# Altium PCB Chicken_Coop_Door_Main_Board_V3.PcbDoc (part 1 of 2)
Units mm, origin at the board's own origin, x right, y up, seen from the top; angles counter-clockwise.
Board outline 52.93 x 44.3 mm, 4 copper layers (Top Layer, Mid-Layer 1, Mid-Layer 2, Bottom Layer), stack 0.949 mm thick; 86 components, 66 nets, 267 pads, 85 vias.
Unrouted connection lines stored in the file: 4.
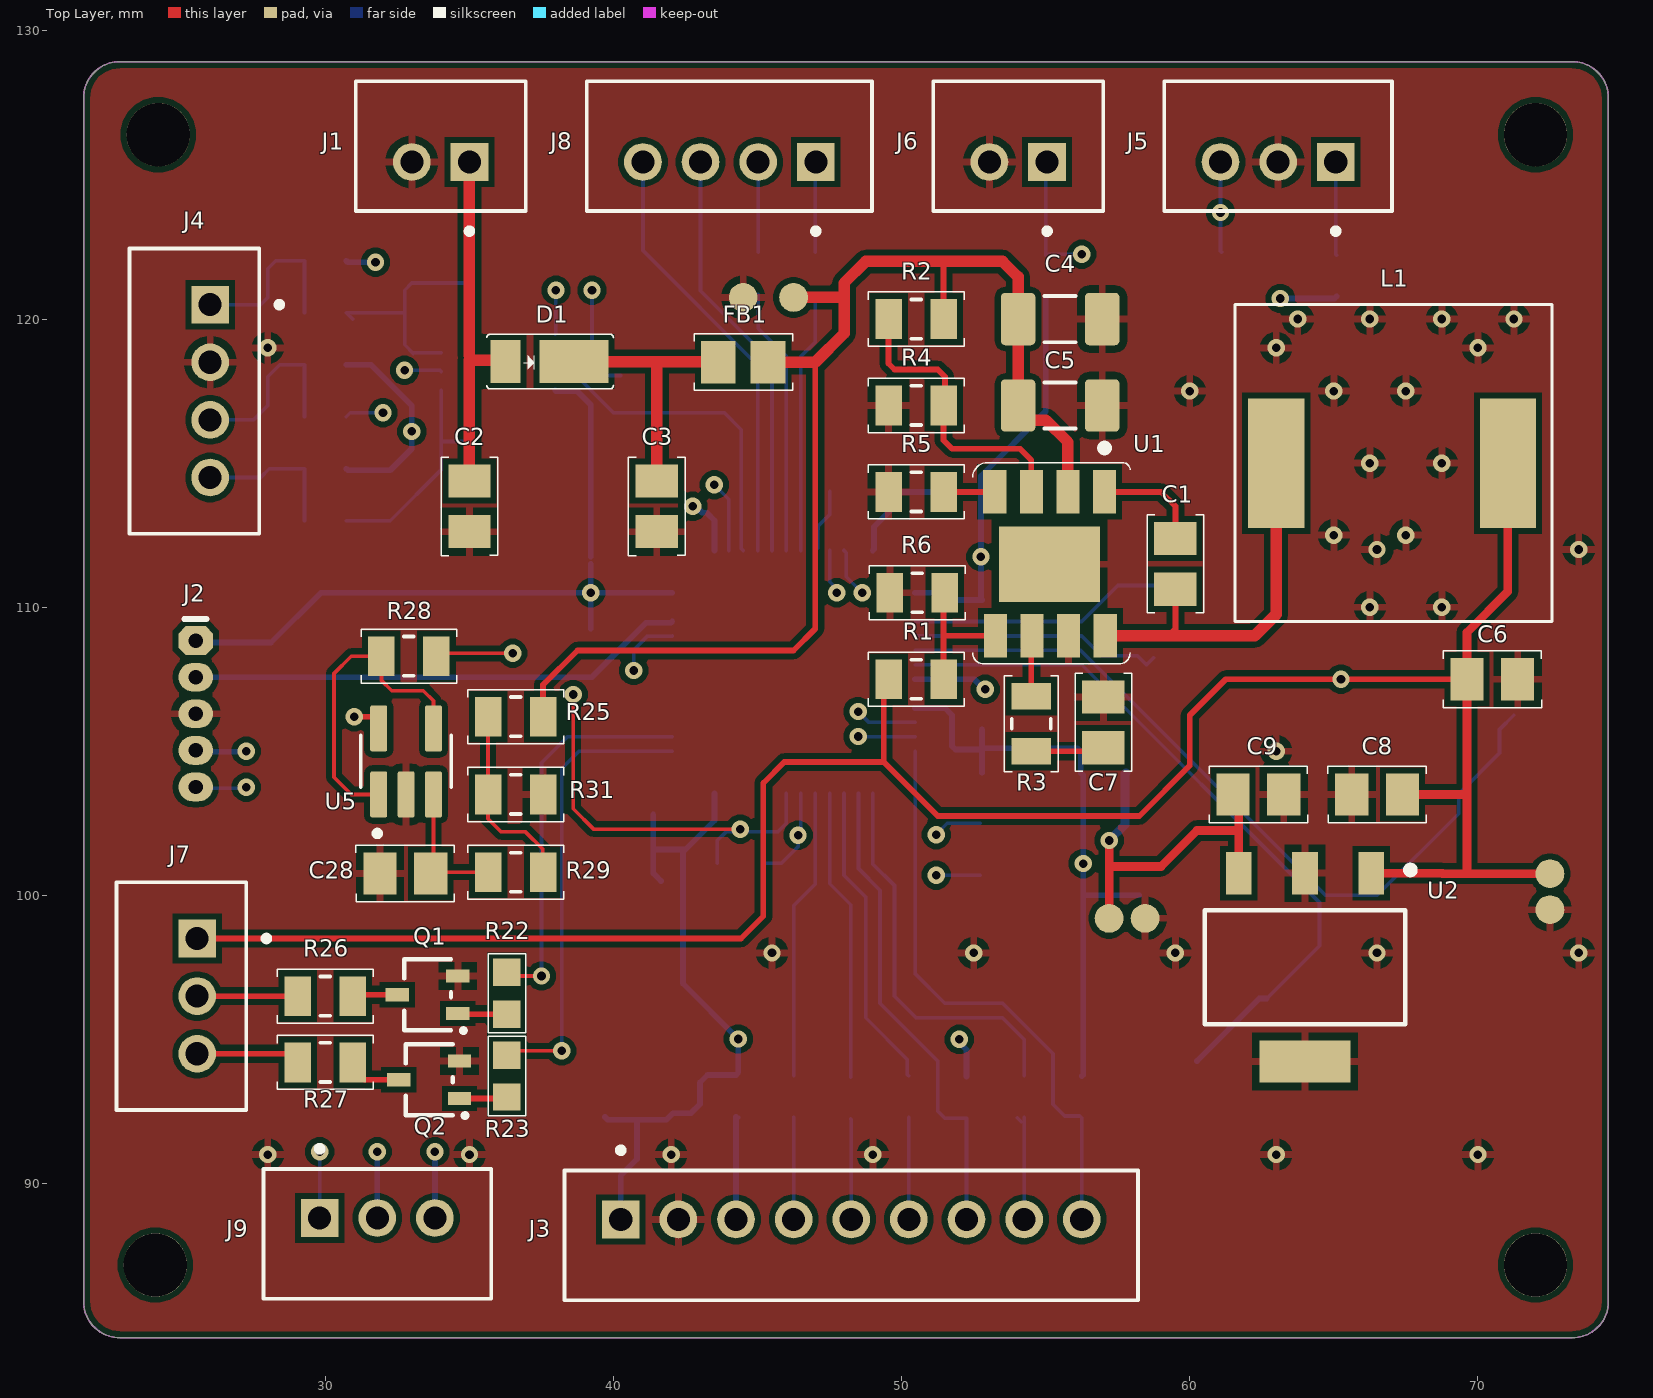
[diagram p0: Top Layer view]
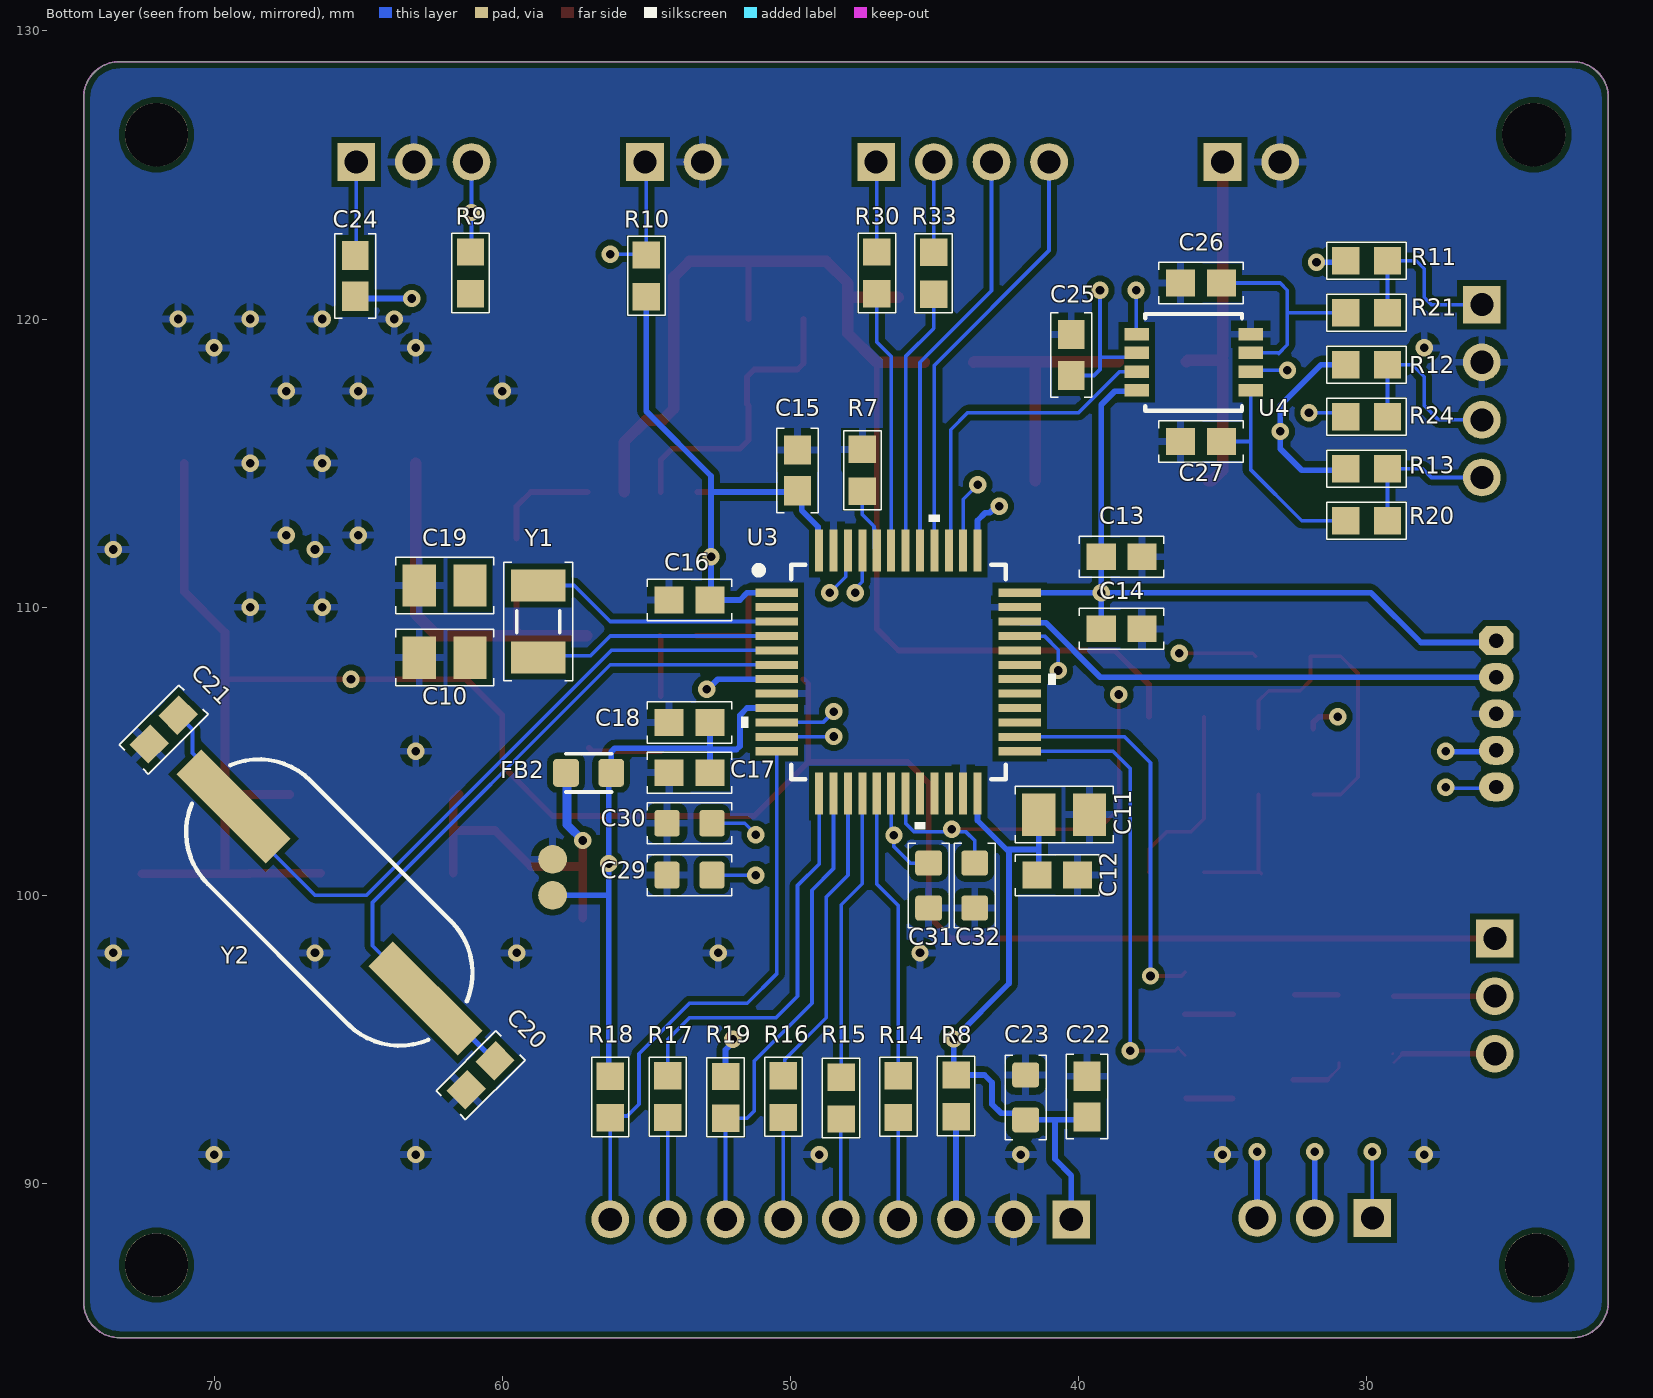
[diagram p1: Bottom Layer view, seen from below]
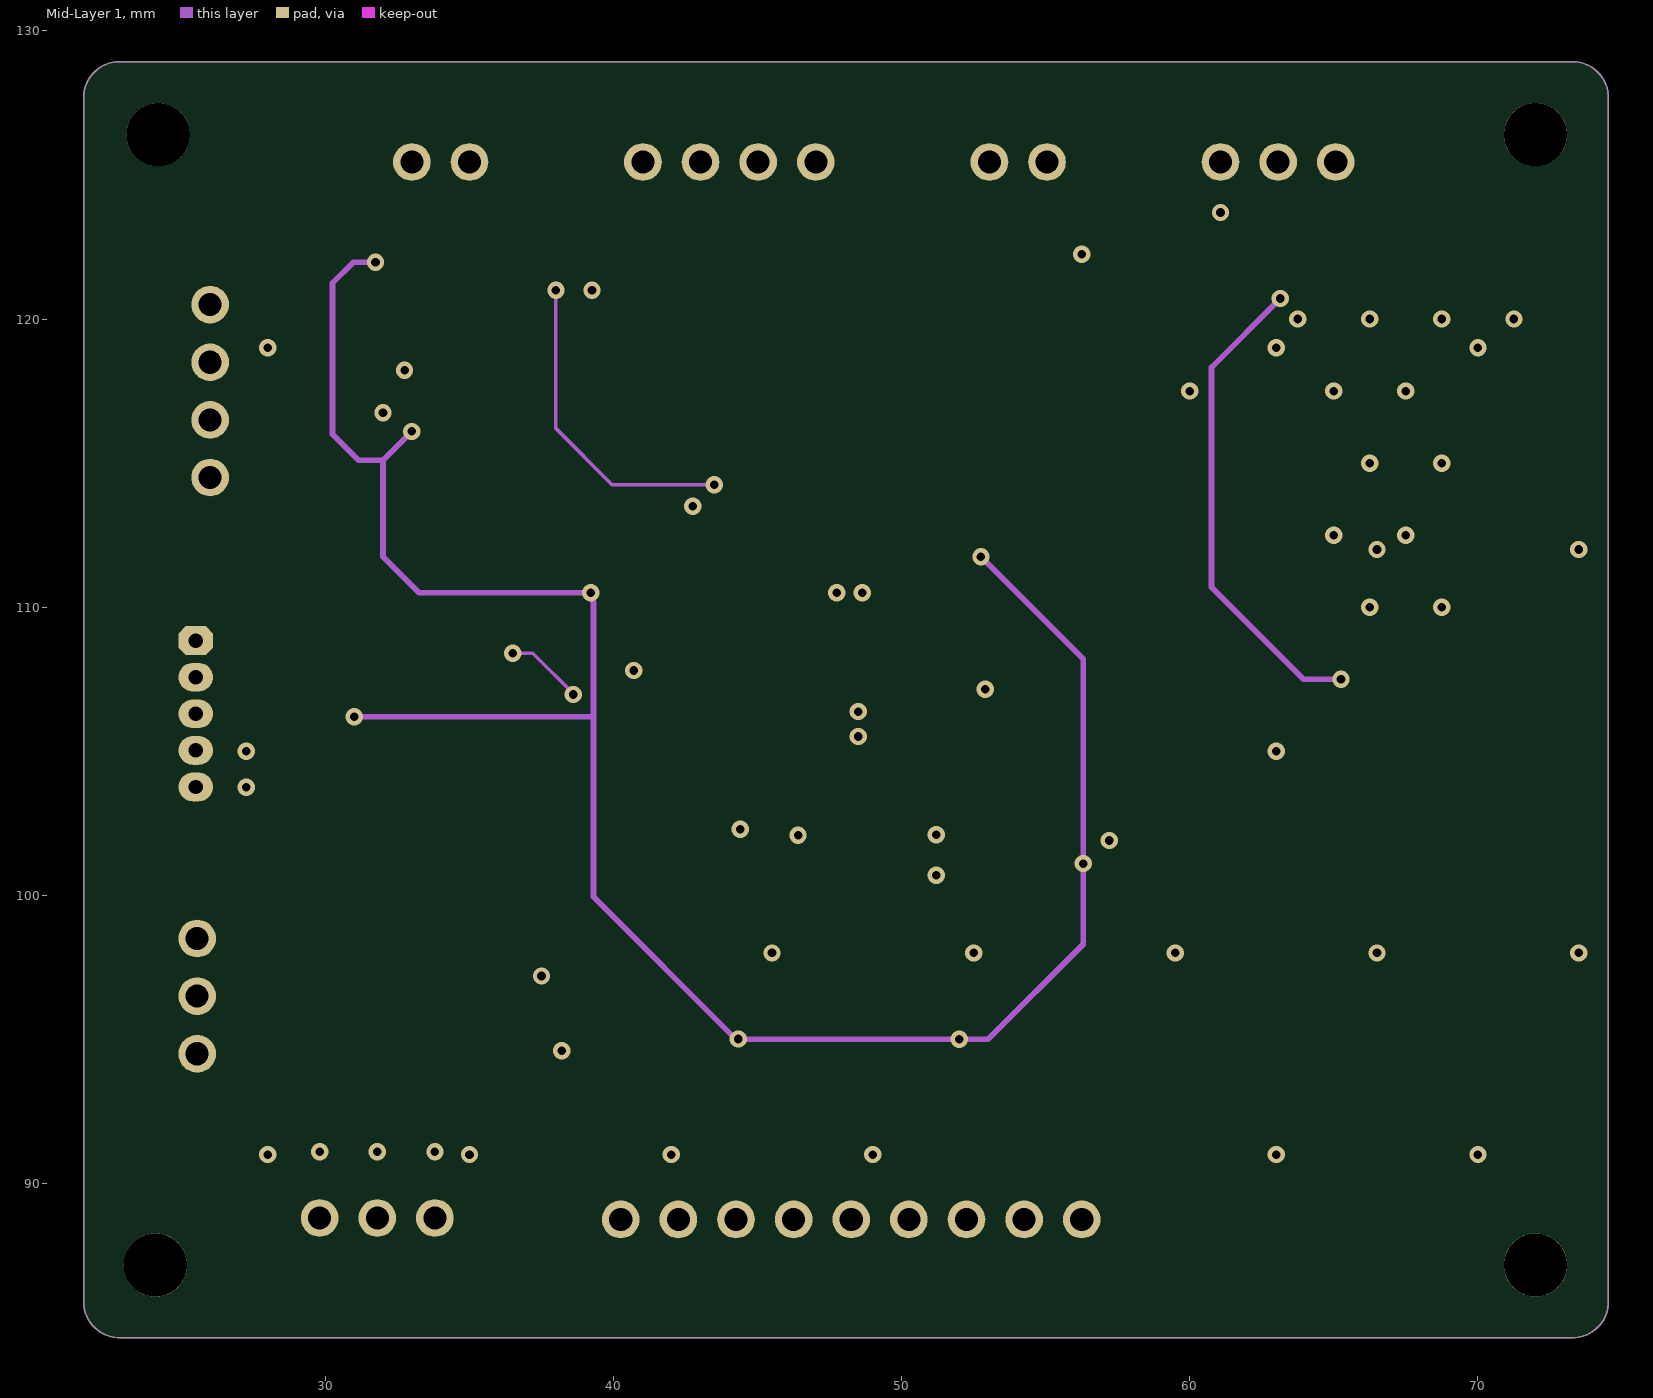
[diagram p2: Mid-Layer 1]
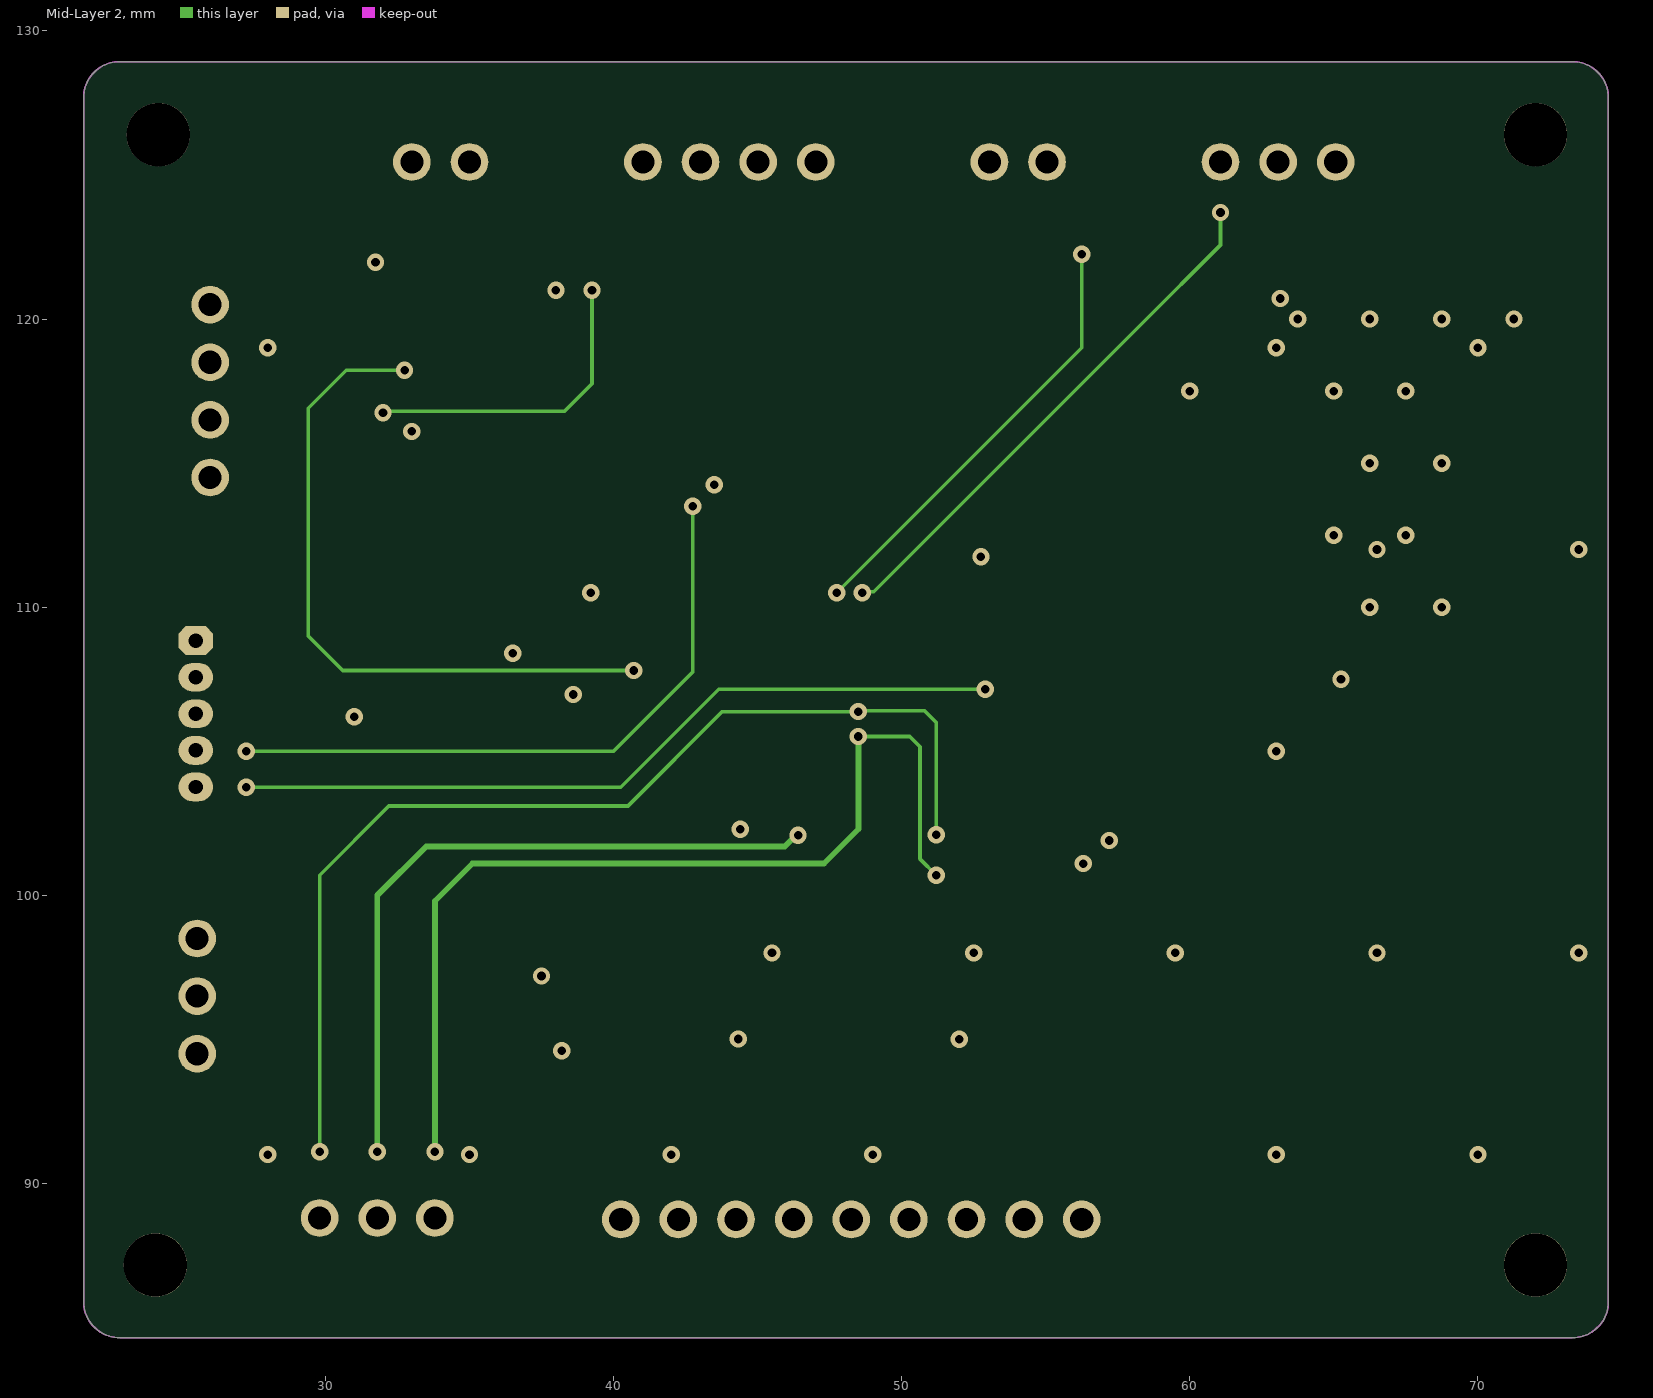
[diagram p3: Mid-Layer 2]
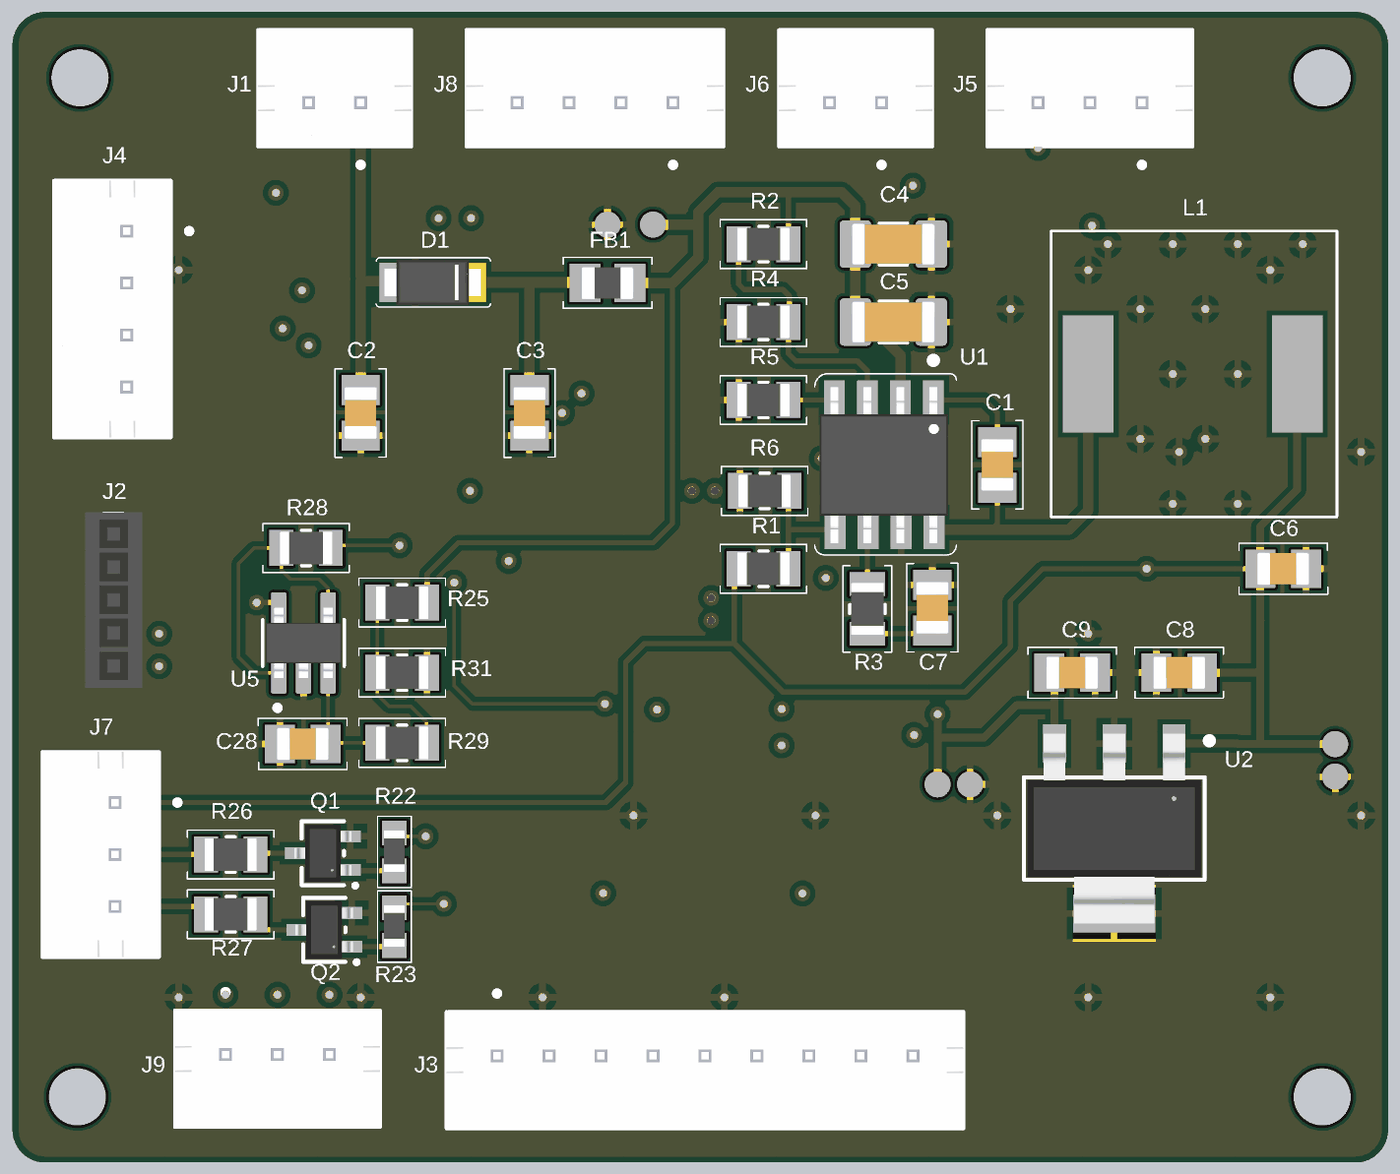
[diagram p4: 3D render of the assembled board from above, using the file's embedded part models]
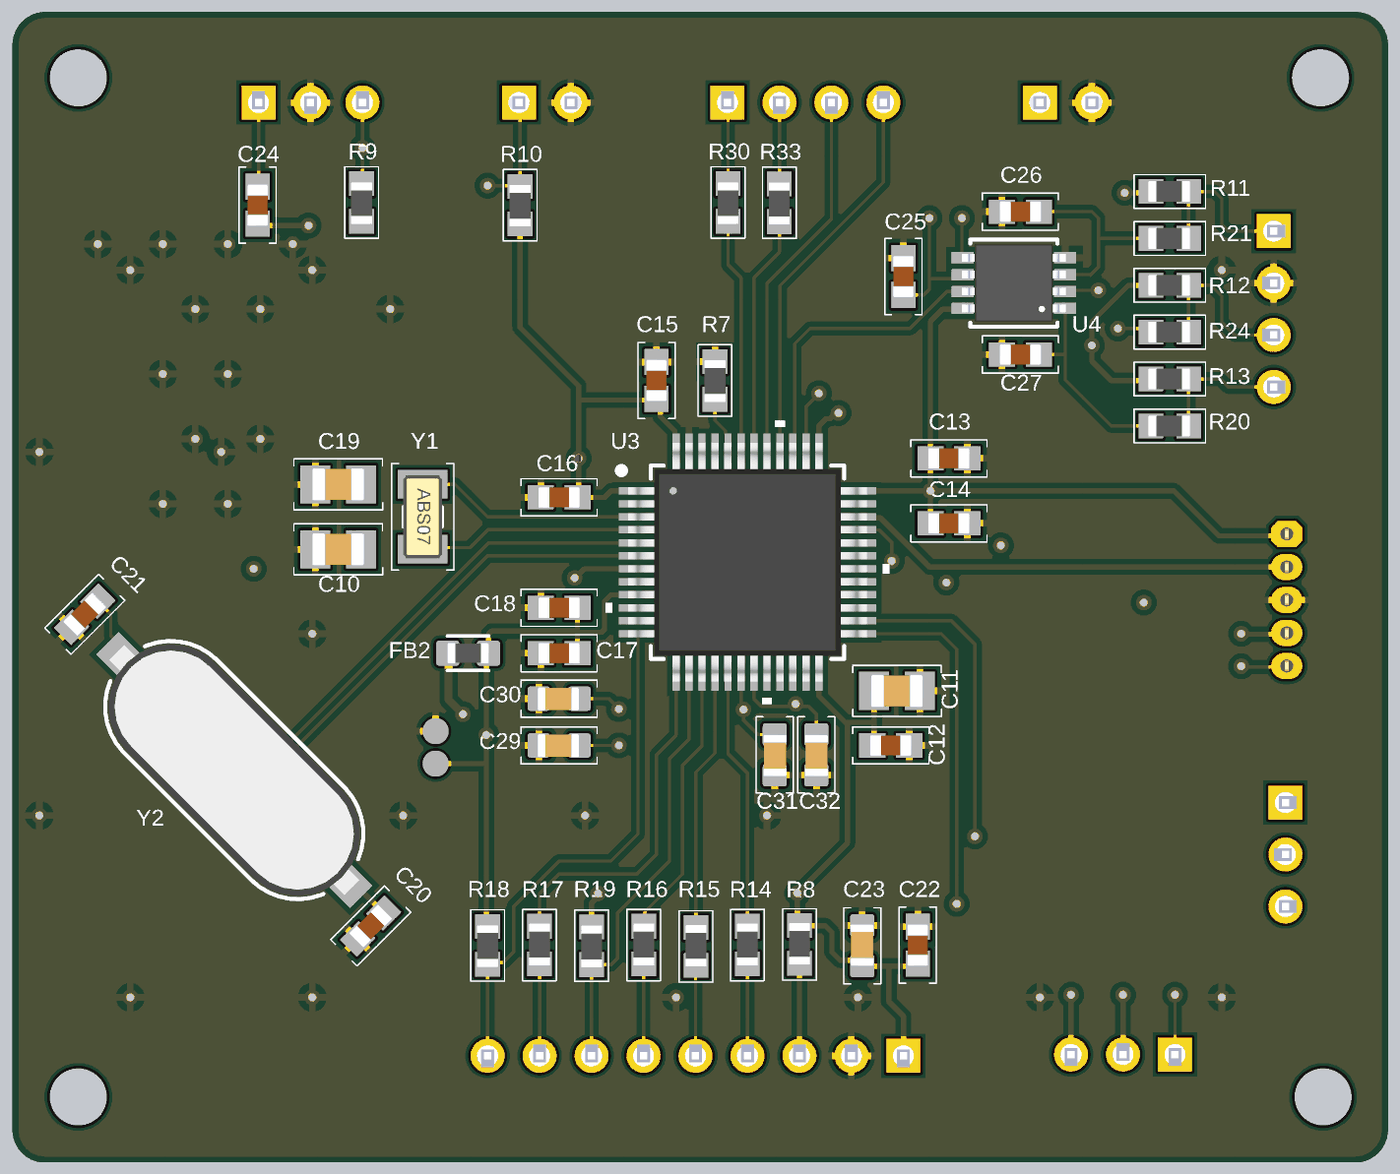
[diagram p5: 3D render of the assembled board from below, using the file's embedded part models]

## Layer stack, top to bottom
Top Solder: solder mask 0.0254, SM-001, Dk 4
Top Layer: signal copper 0.035
Dielectric 1: prepreg 0.0711, PP-006, Dk 4.1
Mid-Layer 1: signal copper 0.035
Dielectric2: dielectric 0.667, FR-4, Dk 4.8
Mid-Layer 2: signal copper 0.035
Dielectric3: prepreg 0.0711, PP-006, Dk 4.1
Bottom Layer: signal copper 0.035
Bottom Solder: solder mask 0.0254, SM-001, Dk 4

## Board outline
22.874,84.641 cw(c22.874,85.911) 21.604,85.911 21.604,127.668 cw(c22.874,127.668) 22.874,128.938 73.262,128.938 cw(c73.262,127.668) 74.532,127.668 74.532,85.899 cw(c73.273,85.899) 73.273,84.641

## Design rules (kind name [scope] priority, off if disabled: settings)
Clearance [All] p1: gap=0.2 ignorepadtopadclearanceinfootprint=FALSE
PolygonConnect [All] p1: connectstyle=Relief reliefconductorwidth=0.254 reliefentries=4 polygonreliefangle="90 Angle" airgapwidth=0.254
RoutingVias [All] p1: holewidth=0.3 width=0.6 viastyle="Through Hole" minholewidth=0.25 minwidth=0.5 maxholewidth=1 maxwidth=2
SolderMaskExpansion [All] p1: expansion=0.102 istentingtop=FALSE
UnRoutedNet [All] p1: checkbadconnections=TRUE
Width [All] p1: maxlimit=1 minlimit=0.1 preferedwidth=0.3 minimp=50.000000 maximp=50.000000 favimp=50.000000
29 further rules are at their usual default settings.

## Classes and differential pairs
component class Power: C1 C2 C3 C4 C5 C6 C7 C8 C9 C28 D1 FB1 J1 L1 R1 R2 R3 R4 R5 R6 R25 R28 R29 R31 U1 U2 U5
component class MCU: C10 C11 C12 C13 C14 C15 C16 C17 C18 C19 C20 C21 C29 C30 C31 C32 FB2 J2 R7 U3 Y1 Y2
component class External_Hardware: C22 C23 C24 C25 C26 C27 J3 J4 J5 J6 J7 J8 J9 Q1 Q2 R8 R9 R10 R11 R12 R13 R14 R15 R16 R17 R18 R19 R20 R21 R22 R23 R24 R26 R27 R30 R33 U4

## Components (designator, comment, footprint, x,y, rotation, side; value= is the part's Value field where it differs from the comment)
C1 "100nF" "CAPC2012X145N 0805" 59.5,111.5 r270 top
C2 "100nF" "CAPC2012X145N 0805" 35,113.5 r90 top
C3 "100nF" "CAPC2012X145N 0805" 41.5,113.5 r90 top
C4 "10uF" "CAPC 1206 3216X180N" 55.5,120 r180 top
C5 "10uF" "CAPC 1206 3216X180N" 55.5,117 r180 top
C6 "22uF" "CAPC2012X145N 0805" 70.5,107.5 r180 top
C7 "100nF" "CAPC2012X145N 0805" 57,106 r270 top
C8 "4.7uF" "CAPC2012X145N 0805" 66.5,103.5 r0 top
C9 "4.7uF" "CAPC2012X145N 0805" 62.38,103.5 r180 top
C10 "8.2pF" "CAPC2012X145N 0805" 62,108.25 r0 bottom
C11 "4.7uF" "CAPC2012X145N 0805" 40.5,102.8 r0 bottom
C12 "100nF" "CAPC 0603 1608X90N" 40.737,100.7 r0 bottom
C13 "1uF" "CAPC 0603 1608X90N" 38.5,111.75 r0 bottom
C14 "100nF" "CAPC 0603 1608X90N" 38.5,109.25 r0 bottom
C15 "100nF" "CAPC 0603 1608X90N" 49.75,114.75 r270 bottom
C16 "100nF" "CAPC 0603 1608X90N" 53.5,110.25 r180 bottom
C17 "1uF" "CAPC 0603 1608X90N" 53.5,104.25 r180 bottom
C18 "10nF" "CAPC 0603 1608X90N" 53.5,106 r180 bottom
C19 "8.2pF" "CAPC2012X145N 0805" 62,110.75 r0 bottom
C20 "22pF" "CAPC 0603 1608X90N" 60.749,93.751 r315 bottom
C21 "22pF" "CAPC 0603 1608X90N" 71.75,105.75 r315 bottom
C22 "100nF" "CAPC 0603 1608X90N" 39.7,93.012 r270 bottom
C23 "10uF" "CAPC1608X90N 0603" 41.834,92.987 r270 bottom
C24 "100nF" "CAPC 0603 1608X90N" 65.1,121.5 r270 bottom
C25 "100nF" "CAPC 0603 1608X90N" 40.25,118.75 r270 bottom
C26 "100nF" "CAPC 0603 1608X90N" 35.75,121.25 r0 bottom
C27 "100nF" "CAPC 0603 1608X90N" 35.75,115.75 r180 bottom
C28 "100nF" "CAPC2012X145N 0805" 32.774,100.757 r0 top
C29 "4.7nF" "CAPC1608X90N 0603" 53.5,100.7 r180 bottom
C30 "4.7nF" "CAPC1608X90N 0603" 53.5,102.5 r180 bottom
C31 "4.7nF" "CAPC1608X90N 0603" 45.2,100.337 r90 bottom
C32 "4.7nF" "CAPC1608X90N 0603" 43.6,100.337 r90 bottom
D1 "DFLS240L-7" "DIODE DFLS240L-7  POWERDI 123" 36.25,118.5 r0 top
FB1 "LCB2012-331Y-N" "BEADC2012X105N MPZ2012S601ATD25" 44.5,118.5 r0 top
FB2 "LCB1608-601Y-N" "MPZ1608S601ATA00 0603 1608X95N" 57,104.25 r180 bottom
J1 "Header 2x1" "JST_B2B-PH-K-S 1x2 Header" 34,126 r0 top
J2 "Header 5x1" "Header 5x1 FEMALE Header" 25.5,106.3 r0 top
J3 "Header 9x1" "Header 9x1 JST_B9B-PH-K-S" 48.25,88.2 r180 top
J4 "Header 4x1" "JST_B4B-PH-K-S 1x4 Header" 25.45,117.5 r90 top
J5 "Header 3x1" "JST_B3B-PH-K-S 1x3 Header" 63.066,126 r0 top
J6 "Header 2x1" "JST_B2B-PH-K-S 1x2 Header" 54.046,126 r0 top
J7 "Header 3x1" "JST_B3B-PH-K-S 1x3 Header" 25,96.5 r90 top
J8 "Header 4x1" "JST_B4B-PH-K-S 1x4 Header" 44.02,126 r0 top
J9 "Header 3x1" "JST_B3B-PH-K-S 1x3 Header" 31.8,88.25 r180 top
L1 "15uH" "Inductor SRI1004-150M" 66.67,115 r0 top
Q1 "MMBT3904W" MMBT3904_PNJ 33.546,96.55 r90 top
Q2 "MMBT3904W" MMBT3904_PNJ 33.6,93.6 r90 top
R1 "52.3k" "RES 0805 YAGEO C2012X60N" 50.5,107.5 r180 top
R2 "71.5k" "RES 0805 YAGEO C2012X60N" 50.5,120 r0 top
R3 "6.98k" "RES 0805 YAGEO C2012X60N" 54.5,105.955 r90 top
R4 "10k" "RES 0805 YAGEO C2012X60N" 50.5,117 r0 top
R5 "200k" "RES 0805 YAGEO C2012X60N" 50.5,114 r0 top
R6 "10k" "RES 0805 YAGEO C2012X60N" 50.545,110.5 r0 top
R7 "10k" "RES 0603 ROYALOHM" 47.5,114.75 r270 bottom
R8 "22R" "RES 0603 ROYALOHM" 44.247,93.037 r90 bottom
R9 "10k" "RES 0603 ROYALOHM" 61.1,121.6 r270 bottom
R10 "10k" "RES 0603 ROYALOHM" 55,121.5 r270 bottom
R11 "10k" "RES 0603 ROYALOHM" 30,122.024 r0 bottom
R12 "10k" "RES 0603 ROYALOHM" 30,118.414 r0 bottom
R13 "10k" "RES 0603 ROYALOHM" 30,114.805 r0 bottom
R14 "33R" "RES 0603 ROYALOHM" 46.253,93.012 r90 bottom
R15 "33R" "RES 0603 ROYALOHM" 48.235,92.961 r90 bottom
R16 "33R" "RES 0603 ROYALOHM" 50.241,93.012 r90 bottom
R17 "33R" "RES 0603 ROYALOHM" 54.254,93.012 r90 bottom
R18 "10k" "RES 0603 ROYALOHM" 56.25,93 r270 bottom
R19 "10k" "RES 0603 ROYALOHM" 52.248,92.987 r270 bottom
R20 "100k" "RES 0603 ROYALOHM" 30,113 r0 bottom
R21 "100k" "RES 0603 ROYALOHM" 30,120.219 r0 bottom
R22 "1.4k" "RES 0603 ROYALOHM" 36.3,96.6 r90 top
R23 "1.8k" "RES 0603 ROYALOHM" 36.3,93.725 r90 top
R24 "100k" "RES 0603 ROYALOHM" 30,116.61 r0 bottom
R25 "50k" "RES 0805 YAGEO C2012X60N" 36.6,106.2 r0 top
R26 "100R" "RES 0805 YAGEO C2012X60N" 30,96.5 r0 top
R27 "180R" "RES 0805 YAGEO C2012X60N" 30,94.2 r0 top
R28 "10R" "RES 0805 YAGEO C2012X60N" 32.9,108.3 r0 top
R29 "1k" "RES 0805 YAGEO C2012X60N" 36.6,100.8 r180 top
R30 "33R" "RES 0603 ROYALOHM" 47,121.6 r270 bottom
R31 "10k" "RES 0805 YAGEO C2012X60N" 36.6,103.5 r180 top
R33 "33R" "RES 0603 ROYALOHM" 45.025,121.59 r270 bottom
U1 "AP64100QSP-13" "AP64100QSP-13 SOIC-8 Buck Converter" 54.5,114 r270 top
U2 "MCP1825ST-3302E" "LDO MCP1825ST-3302E/DB  SOT-223_3MC_MCH" 64,97.5 r180 top
U3 "STM32F103C8T6" LQFP48_STM 46.25,107.75 r180 bottom
U4 "74LVC3G17DP,125" "Schmitt Triger 74LVC3G17DP,125 TSSOP8_SOT505-2_NEX" 36,118.5 r0 bottom
U5 "MCP6001T-I" "MCP6001T-I/OT OPAMP SOT-23-5" 32.8,104.645 r90 top
Y1 "32.768kHz" XTAL_ABS07-120-32.768KHZ-T 58.75,109.5 r270 bottom
Y2 "8MHz" XTAL_J49SMH-A-G-G-K-8M0_JAU 66,99.75 r225 bottom

## Footprints (in the part's own frame and the unit in brackets; to place one, negate y for a bottom-side part, rotate by r counter-clockwise, add the part's x,y. Pads: shape width x height; smd on the part's side, far side on the other; paste and mask are expansions set on the pad)
"AP64100QSP-13 SOIC-8 Buck Converter" [mm]
  rect 1.505x0.802 smd paste-2539.97 mask-2539.97: 1(0,2.54) 2(0,1.27) 3(0,0) 4(0,-1.27) 5(4.995,-1.245) 6(4.995,0.025) 7(4.995,1.295) 8(4.995,2.565)
  rect 2.613x3.502 smd paste-2539.97 mask-2539.97: 9(2.509,0.634)
  silkscreen extent -1.65,-2.03 5.97,3.43, body extent -0.49,-1.85 5.51,3.11, height 1.47
"BEADC2012X105N MPZ2012S601ATD25" [mm]
  rect 1.2x1.47 smd: 1(-0.86,0) 2(0.86,0)
  silkscreen extent -1.7,-0.98 1.71,0.99, body extent -1,-0.63 1,0.63, height 1.05
"CAPC1608X90N 0603" [mm]
  rrect25% 0.87x0.93 smd: 1(-0.78,0) 2(0.78,0)
  silkscreen extent -1.47,-0.71 1.47,0.71, body extent -0.83,-0.46 0.77,0.44, height 0.78
"CAPC2012X145N 0805" [mm]
  rect 1.15x1.47 smd: 1(-0.88,0) 2(0.88,0)
  silkscreen extent -1.71,-0.98 1.7,0.98, body extent -1,-0.63 1,0.63, height 0.95
"CAPC 0603 1608X90N" [mm]
  rect 1.01x0.93 smd: 1(-0.709,0) 2(0.709,0)
  silkscreen extent -1.47,-0.71 1.47,0.71, body extent -0.8,-0.4 0.8,0.4, height 0.9
"CAPC 1206 3216X180N" [mm]
  rrect25% 1.2x1.82 smd: 1(-1.46,0) 2(1.46,0)
  silkscreen extent -0.54,-0.8 0.54,0.8, body extent -1.6,-0.8 1.6,0.8, height 1.8
"DIODE DFLS240L-7  POWERDI 123" [mm]
  rect 1.05x1.5 smd mask-2539.97: 1(0,0.025)
  rect 2.4x1.5 smd paste-2539.97 mask-2539.97: 2(2.375,0.025)
  silkscreen extent -0.65,-0.93 3.75,0.98, body extent -0.32,-0.86 3.37,0.92, height 1
"Header 5x1 FEMALE Header" [mm]
  oct 1.2x1 hole 0.5: 1(0,2.54)
  oval 1.2x1 hole 0.5: 2(0,1.27) 3(0,0) 4(0,-1.27) 5(0,-2.54)
  silkscreen extent -0.4,3.29 0.38,3.29, body extent -1.1,-3.38 1.1,3.38, height 4.5
"Header 9x1 JST_B9B-PH-K-S" [mm]
  rect 1.308x1.308 / inner round 1.308 / far side rect 1.308x1.308 hole 0.8: 1(8,-0.55)
  round 1.308 hole 0.8: 2(6,-0.55) 3(4,-0.55) 4(2,-0.55) 5(0,-0.55) 6(-2,-0.55) 7(-4,-0.55) 8(-6,-0.55) 9(-8,-0.55)
  silkscreen extent -9.95,-3.05 9.95,2.25, body extent -9.95,-2.25 9.95,2.25, height 6
"Inductor SRI1004-150M" [mm]
  rect 1.95x4.5 smd paste-2539.97 mask-2539.97: 1(-3.67,0) 2(4.37,0)
  silkscreen extent -5.1,-5.5 5.9,5.5
"JST_B2B-PH-K-S 1x2 Header" [mm]
  rect 1.308x1.308 / inner round 1.308 / far side rect 1.308x1.308 hole 0.8: 1(1,-0.55)
  round 1.308 hole 0.8: 2(-1,-0.55)
  silkscreen extent -2.95,-3.05 2.95,2.25, body extent -2.95,-2.25 2.95,2.25, height 6
"JST_B3B-PH-K-S 1x3 Header" [mm]
  rect 1.308x1.308 / inner round 1.308 / far side rect 1.308x1.308 hole 0.8: 1(2,-0.55)
  round 1.308 hole 0.8: 2(0,-0.55) 3(-2,-0.55)
  silkscreen extent -3.95,-3.05 3.95,2.25, body extent -3.95,-2.25 3.95,2.25, height 6
"JST_B4B-PH-K-S 1x4 Header" [mm]
  rect 1.308x1.308 / inner round 1.308 / far side rect 1.308x1.308 hole 0.8: 1(3,-0.55)
  round 1.308 hole 0.8: 2(1,-0.55) 3(-1,-0.55) 4(-3,-0.55)
  silkscreen extent -4.95,-3.05 4.95,2.25, body extent -4.95,-2.25 4.95,2.25, height 6
"LDO MCP1825ST-3302E/DB  SOT-223_3MC_MCH" [mil]
  rect 35x58 smd paste+0 mask+0: 1(-90.55,-128.7) 2(0,-128.7) 3(90.55,-128.7)
  rect 124.02x58.03 smd paste+0 mask+0: 4(0,128.7)
  silkscreen extent -149,-138 137,78, body extent -132,-144 132,144, height 71
LQFP48_STM [mil]
  rect 58x11 smd paste+0 mask+0: 1(-166,108.27) 2(-166,88.58) 3(-166,68.9) 4(-166,49.21) 5(-166,29.53) 6(-166,9.84) 7(-166,-9.84) 8(-166,-29.53) 9(-166,-49.21) 10(-166,-68.9) 11(-166,-88.58) 12(-166,-108.27) 25(166,-108.27) 26(166,-88.58) 27(166,-68.9) 28(166,-49.21) 29(166,-29.53) 30(166,-9.84) 31(166,9.84) 32(166,29.53) 33(166,49.21) 34(166,68.9) 35(166,88.58) 36(166,108.27)
  rect 11x58 smd paste+0 mask+0: 13(-108.27,-166) 14(-88.58,-166) 15(-68.9,-166) 16(-49.21,-166) 17(-29.53,-166) 18(-9.84,-166) 19(9.84,-166) 20(29.53,-166) 21(49.21,-166) 22(68.9,-166) 23(88.58,-166) 24(108.27,-166) 37(108.27,166) 38(88.58,166) 39(68.9,166) 40(49.21,166) 41(29.53,166) 42(9.84,166) 43(-9.84,166) 44(-29.53,166) 45(-49.21,166) 46(-68.9,166) 47(-88.58,166) 48(-108.27,166)
  silkscreen extent -215,-215 215,215, body extent -181,-181 181,181, height 63
"MCP6001T-I/OT OPAMP SOT-23-5" [mm]
  rrect25% 1.61x0.59 smd: 1(-1.145,0.95) 2(-1.145,0) 3(-1.145,-0.95) 4(1.145,-0.95) 5(1.145,0.95)
  silkscreen extent -2.6,-1.57 0.9,1.57, body extent -1.35,-1.45 1.35,1.45, height 1.45
MMBT3904_PNJ [mil]
  rect 18x32 smd paste+0 mask+0: 1(-25.59,-41.5) 2(25.59,-41.5) 3(0,41.5)
  silkscreen extent -52,-52 48,32, body extent -44,-44 44,44, height 44
"MPZ1608S601ATA00 0603 1608X95N" [mm]
  rrect30% 0.9x0.97 smd: 1(-0.785,0) 2(0.785,0)
  silkscreen extent -0.8,-0.66 0.8,0.66, body extent -0.8,-0.4 0.8,0.4, height 0.95
"RES 0603 ROYALOHM" [mm]
  rect 0.95x0.95 smd: 1(-0.725,0) 2(0.725,0)
  silkscreen extent -1.38,-0.65 1.38,0.65, body extent -0.77,-0.4 0.83,0.4, height 0.45
"RES 0805 YAGEO C2012X60N" [mm]
  rect 0.92x1.38 smd: 1(-0.955,0) 2(0.955,0)
  silkscreen extent -1.67,-0.94 1.67,0.94, body extent -1,-0.63 1,0.63, height 0.6
"Schmitt Triger 74LVC3G17DP,125 TSSOP8_SOT505-2_NEX" [mil]
  rect 33.5x17 smd paste+0 mask+0: 1(-77.75,38.39) 2(-77.75,12.8) 3(-77.75,-12.8) 4(-77.75,-38.39) 5(77.75,-38.39) 6(77.75,-12.8) 7(77.75,12.8) 8(77.75,38.39)
  silkscreen extent -66,-66 66,66, body extent -79,-59 79,59, height 43
XTAL_ABS07-120-32.768KHZ-T [mm]
  rect 1.1x1.9 smd: 1(-1.25,0) 2(1.25,0)
  silkscreen extent -2.05,-1.2 2.05,1.2, body extent -1.6,-0.75 1.6,0.75, height 0.89
XTAL_J49SMH-A-G-G-K-8M0_JAU [mil]
  rect 173x48 smd paste+0 mask+0: 1(-185.5,0) 2(185.5,0)
  silkscreen extent -228,-100 228,100, body extent -252,-94 252,94, height 159

## Part data
C1: library part "CAP 0805 100nF", "MLCC 0805 100nF 50VDC ±10% X7R", Dielectric=X7R, Manufacturer=SAMSUNG, Manufacturer Code=CL21B104KBCNNNC, Operating Temp.="-55 °C ~ +125 °C", Package Size=0805, Tolerance="±10 %", Voltage Rating=50VDC, Capacitance=100nF, Product Site=https://www.ozdisan.com/p/smt-smd-ve-mlcc-kapasitorler-184/samsung-cl21b104kbcnnnc-14777
C2 C3 C28: library part "CAP 0805 100nF CC0805JRX7R9BB104", "MLCC 0805 100nF 50VDC ±10% X7R", Dielectric=X7R, Manufacturer=YAGEO, Manufacturer Code=CC0805JRX7R9BB104, Operating Temp.="-55 °C ~ +125 °C", Package Size=0805, Tolerance="±5 %", Voltage Rating=50VDC, Capacitance=100nF
  C2 C3: Product Site=https://www.ozdisan.com/p/smt-smd-ve-mlcc-kapasitorler-184/samsung-cl21b104kbcnnnc-14777
  C28: ComponentLink1Description="Product Site", ComponentLink1URL=https://www.ozdisan.com/p/smt-smd-ve-mlcc-kapasitorler-184/yageo-cc0805jrx7r9bb104-748830
C4 C5: library part "CAP 1206 10uF CL31A106KBHNNNE", "MLCC (3216) 1206 10uF 50VDC ±10% X5R", Capacitance="10 uF", Manufacturer="Samsung Electro-Mechanics", Manufacturer Product Number=CL31B225KCHSNNE, Operating Temperature="-55 °C ~ +85 °C", Package / Case=1206, Temperature Coefficient=X5R, Tolerance=±10%, Voltage - Rated="50 VDC", ComponentLink1Description="Product Site", ComponentLink1URL=https://www.ozdisan.com/p/smt-smd-ve-mlcc-kapasitorler-184/samsung-cl31a106kbhnnne-437276
C6: library part "CAP 0805 22uF CL21A226KOQNNNE", "MLCC (2012) 0805 22uF 16VDC ±10% X5R CL21A226KOQNNNE", Capacitance="22 µF", Manufacturer=SAMSUNG, Manufacturer Product Number=CL21A226KOQNNNE, Operating Temperature="-55°C ~ 85°C", Package / Case="0805 (2012 Metric)", Temperature Coefficient=X5R, Tolerance="±10 %", Voltage - Rated=25V, ComponentLink1Description="Product Site", ComponentLink1URL=https://www.digikey.com/en/products/detail/tdk/C2012X5R1E226M125AC/3661564?s=N4IgTCBcDaIMJgAwEYwA0CsAlZBRMYAbALKoYCCIAugL5A
C7: library part "CAP 0805 10nF CC0805KRX7R9BB103", "MLCC (2012) 0805 10nF 50VDC ±10% X7R", Capacitance=10nF, Dielectric=X7R, Manufacturer=YAGEO, Manufacturer Code=CC0805KRX7R9BB103, Operating Temp.="-55 °C ~ +125 °C", Package Size=0805, Tolerance="±10 %", Voltage Rating=50VDC, ComponentLink1Description="Product Site", ComponentLink1URL=https://www.ozdisan.com/p/smt-smd-ve-mlcc-kapasitorler-184/yageo-cc0805krx7r9bb103-534845
C8 C9: library part "CAP 0805 4.7uF CL21A475KAQNNNE", "MLCC (2012) 0805 4.7uF 25VDC ±10% X5R", Dielectric=X5R, Manufacturer=SAMSUNG, Manufacturer Product Number=CL21A475KAQNNNE, Operating Temp.="-55 °C ~ +125 °C", Package Size=0805, Tolerance="±10 %", Voltage Rating="25 VDC", Capacitance=4.7uF, ComponentLink1Description="Product Site", ComponentLink1URL=https://www.ozdisan.com/p/smt-smd-ve-mlcc-kapasitorler-184/samsung-cl21a475kaqnnne-441542
C10 C19: library part "CAP 0805 8.2pF CC0805DRNPO9BN8R2", "MLCC (2012) 0805 8.2pF 50VDC ±0.5pF C0G (NP0)", Dielectric="C0G (NP0)", Manufacturer=YAGEO, Manufacturer Code=CC0805DRNPO9BN8R2, Operating Temp.="-55 °C ~ +125 °C", Package Size=0805, Tolerance="±0.5 pF", Voltage Rating=50VDC, Capacitance=8.2pF, ComponentLink1Description="Product Site", ComponentLink1URL=https://www.ozdisan.com/p/smt-smd-ve-mlcc-kapasitorler-184/yageo-cc0805drnpo9bn8r2-748686
C11: library part "CAP 0805 4.7uF CL21B475KOQVPNE", "MLCC (2012) 0805 4.7uF 16VDC ±10% X7R AUTOMOTIVE", Dielectric=X7R, Manufacturer=SAMSUNG, Manufacturer Product Number=CL21B475KOQVPNE, Operating Temp.="-55 °C ~ +125 °C", Package Size=0805, Tolerance="±10 %", Voltage Rating="16 VDC", Capacitance=4.7uF, ComponentLink1Description="Product Site", ComponentLink1URL=https://www.ozdisan.com/p/smt-smd-ve-mlcc-kapasitorler-184/samsung-cl21b475koqvpne-522984
C12 C14 C15 C16 C22 C24 C25 C26 C27: library part "CAP 0603 100nF CC0603KPX7R8BB104", "MLCC (1608) 0603 100nF 25VDC ±10% X7R", Manufacturer=YAGEO, Manufacturer Product Number=CC0603KPX7R8BB104, Operating Temperature="-55°C ~ 125°C", Package / Case="0603 (1608 Metric)", Temperature Coefficient=X7R, Tolerance=±10%, Voltage - Rated="25 VDC", Capacitance=100nF, ComponentLink1Description="Product Site", ComponentLink1URL=https://www.ozdisan.com/p/smt-smd-ve-mlcc-kapasitorler-184/yageo-cc0603kpx7r8bb104-747645
C13 C17: library part "CAP 0603 1uF C0603C105K4PACTU", "MLCC (1608) 0603 1uF 16VDC ±10% X5R", Manufacturer=KEMET, Manufacturer Product Number=C0603C105K4PACTU, Operating Temperature="-55°C ~ 125°C", Package / Case="0603 (1608 Metric)", Temperature Coefficient=X5R, Tolerance=±10%, Voltage - Rated="16 VDC", Capacitance=1uF, ComponentLink1Description="Product Site", ComponentLink1URL=https://www.ozdisan.com/p/smt-smd-ve-mlcc-kapasitorler-184/kemet-c0603c105k4pactu-530892
C18: library part "CAP 0603 10nF CL10B103KA8NNNC", "MLCC (1608) 0603 10nF 25VDC ±10% X7R", Manufacturer=SAMSUNG, Manufacturer Product Number=CL10B103KA8NNNC, Operating Temperature="-55°C ~ 125°C", Package / Case="0603 (1608 Metric)", Temperature Coefficient=X7R, Tolerance=±10%, Voltage - Rated=25VDC, Capacitance=10nF, ComponentLink1Description="Product Site", ComponentLink1URL=https://www.ozdisan.com/p/smt-smd-ve-mlcc-kapasitorler-184/samsung-cl10b103ka8nnnc-354624
C20 C21: library part "CAP 0603 22pF CC0603JRNPO9BN220", "MLCC (1608) 0603 22pF 50VDC ±5% C0G (NP0)", Manufacturer=YAGEO, Manufacturer Product Number=CC0603JRNPO9BN220, Operating Temperature="-55°C ~ 125°C", Package / Case="0603 (1608 Metric)", Temperature Coefficient="C0G (NP0)", Tolerance="±5 %", Voltage - Rated="50 VDC", Capacitance=22pF, ComponentLink1Description="Product Site", ComponentLink1URL=https://www.ozdisan.com/p/smt-smd-ve-mlcc-kapasitorler-184/yageo-cc0603jrnpo9bn220-576596
C23: library part "CAP 0603 10uF CL10A106KP8NNNC", "MLCC (1608) 0603 10uF 10VDC ±10% X5R", Manufacturer=SAMSUNG, Manufacturer Code=CL10A106KP8NNNC, Operation Temperature="-55°C ~ 85°C", Package / Case="0603 (1608 Metric)", Tolerance="±10 %", Voltage Rating=10VDC, Capacitance=10uF, ComponentLink1Description="Product Site", ComponentLink1URL=https://www.ozdisan.com/p/smt-smd-ve-mlcc-kapasitorler-184/samsung-cl10a106kp8nnnc-350863
C29 C30 C31 C32: library part "CAP 0603 4.7nF CL10B472KB8NNNC", "MLCC (1608) 0603 4.7nF 50VDC ±10% X7R", Manufacturer=SAMSUNG, Manufacturer Code=CL10B472KB8NNNC, Operation Temperature="-55 °C ~ +125 °C", Package / Case="0603 (1608 Metric)", Tolerance="±10 %", Voltage Rating="50 VDC", Capacitance=4.7nF, ComponentLink1Description="Product Site", ComponentLink1URL=https://www.ozdisan.com/p/smt-smd-ve-mlcc-kapasitorler-184/samsung-cl10b472kb8nnnc-14009
D1: library part "DIODE SCHOTTKY DFLS240L-7", "DIODE SCHOTTK 40V 2A POWERDI 123", Capacitance @ Vr, F="90pF @ 10V, 1MHz", Current - Average Rectified (Io)=2A, Current - Reverse Leakage @ Vr="100 µA @ 40 V", Manufacturer="Diodes Incorporated", Package / Case=POWERDI®123, Voltage - DC Reverse="40 V", Voltage - Forward (Vf) (Max) @ If="500 mV @ 2 A", Manufacturer Product Number=DFLS240L-7
FB1: library part "Ferrite Bead LCB2012-331Y-N", "FERRITE BEAD 0805 330R/100MHZ SMD", Current Rating (Max)=1.5A, DC Resistance (DCR) (Max)=100mOhm, Manufacturer="CORE MASTER", Operating Temperature="-55°C ~ 125°C", Package / Case="0805 (2012 Metric)", Impedance @ Frequency="330 Ohms @ 100 MHz", ComponentLink1Description="Product Site", ComponentLink1URL=https://www.ozdisan.com/p/bead-feritler-469/core-master-lcb2012-331y-n-487985, Manufacturer Product Number=LCB2012-331Y-N
FB2: library part "Ferrite Bead LCB1608-601Y-N", "600 Ohms @ 100 MHz 1 Power Line Ferrite Bead 0603 (1608 Metric) 1A 200mOhm", Current="1 A", Manufacturer="CORE MASTER", Package Size=0603, Tolerance="±25 %", ComponentLink1Description="Product Site", ComponentLink1URL=http://ozdisan.com/p/bead-feritler-469/core-master-lcb1608-601y-n-496992, DCR="200 m Ohms", Manufacturer Code=LCB1608-601Y-N, Impedance="600 Ohms"
J1 J6: library part "Header 2x1 DS1066-2MVW6X", "CON.T.B.2.00MM 2P 180C MALE CONNFLY", Current Rating (Amps)=2A, Manufacturer=CONNFLY, Manufacturer Product Number=DS1066-2MVW6X, Voltage Rating=100V, ComponentLink1Description="Product Site", ComponentLink1URL=https://www.ozdisan.com/p/pcb-konnektorler-310/connfly-ds1066-2mvw6x-423540, Contact Type="Male Pin", Mounting Type="Through Hole", Pitch - Mating="0.079\" (2.00mm)", Series=PH
J2: library part "Header 5x1 Female Header", "FEMALE HEADER 5PIN(1x5) 2.54mm THT V/T BAG", Manufacturer="KLS ELECTRONIC", Manufacturer Product Number=L-KLS1-208-1-05-S, ComponentLink1Description="Product Site", ComponentLink1URL=https://www.ozdisan.com/p/disi-headerlar-294/kls-electronic-l-kls1-208-1-05-s-479014, Contact Type="Female Socket", Mounting Type="Through Hole", Number of Positions=5, Pitch - Mating="0.100\" (2.54mm)"
J3: library part "Header 9x1 DS1066-9MVW6S", "CON.T.B.2.00MM 9P 180C MALE WHITE CONNFLY", Manufacturer=CONNFLY, Manufacturer Product Number=DS1066-9MVW6S, ComponentLink1Description="Product Site", ComponentLink1URL=https://www.ozdisan.com/p/pcb-konnektorler-310/connfly-ds1066-9mvw6s-493789, Contact Type="Male Pin", Mounting Type="Through Hole", Pitch - Mating="0.079\" (2.00mm)", Series=PH
J4 J8: library part "Header 4x1 DS1066-4MVW6X", "CON.T.B.2MM 4P 180C MALE WHITE CONNFLY", Manufacturer=CONNFLY, Manufacturer Product Number=DS1066-4MVW6X, ComponentLink1Description="Product Site", ComponentLink1URL=https://www.ozdisan.com/p/pcb-konnektorler-310/connfly-ds1066-4mvw6x-357972, Contact Type="Male Pin", Mounting Type="Through Hole", Pitch - Mating="0.079\" (2.00mm)", Series=PH
J5 J7 J9: library part "Header 3x1 DS1066-3MVW6X", "CON.T.B.2.00MM 3P 180C MALE CONNFLY", Manufacturer=CONNFLY, Manufacturer Product Number=DS1066-3MVW6X, ComponentLink1Description="Product Site", ComponentLink1URL=https://www.ozdisan.com/p/pcb-konnektorler-310/connfly-ds1066-3mvw6x-493781, Contact Type="Male Pin", Mounting Type="Through Hole", Pitch - Mating="0.079\" (2.00mm)", Series=PH
L1: library part "15uH Inductor SRI1004-150M", "INDUCTOR POWER 15UH 10X10X4.5MM SMD", Current Rating="3.9 A", DC Resistance (DCR)="80 m Ohms", Manufacturer="CORE MASTER", Manufacturer Product Number=SRI1004-150M, Tolerance="±20 %", Inductance="15 uH", ComponentLink1Description="Product Site", ComponentLink1URL=https://www.ozdisan.com/p/sabit-induktorler-468/core-master-sri1004-150m-508899, Mounting Type=SMT
Q1 Q2: library part "NPN Transistor MMBT3904W", "Bipolar (BJT) Transistor NPN 40 V 200 mA 150 mW Surface Mount SOT-323", Current - Collector (Ic) (Max)="200 mA", Current - Collector Cutoff (Max)=50nA, DC Current Gain (hFE)="100 @ 10mA, 1V", Manufacturer="Panjit International Inc.", Manufacturer Product Number=MMBT3904W_R1_00001, Package / Case=SOT-323, Power - Max="150 mW", Voltage - Collector Emitter Breakdown (Max)="40 V", Product Site=https://www.digikey.com/en/products/detail/panjit-international-inc/MMBT3904W-R1-00001/14660622, Transistor Type=NPN
R1: library part "RES 0805 52.3k 0805S8F5232T5E", "RES.(2012) 0805 52.3K Ohms 1% 1/8W-S 100PPM", Manufacturer=ROYALOHM, Manufacturer Code=0805S8F5232T5E, Max Working Current=5A, Max Working Voltage=150VDC, Package / Case=0805, Power=1/8W, Resistance="52.3k Ohms", Tolerance="±1 %", ComponentLink1Description="Product Site", ComponentLink1URL=https://www.ozdisan.com/p/smt-smd-ve-cip-direncler-194/royalohm-0805s8f5232t5e-505572
R2: library part "RES 0805 71.5k Ohms 0805S8F7152T5E", "RES.(2012) 0805 71.5k Ohms 1% 1/8W-S 100PPM", Manufacturer=ROYALOHM, Manufacturer Code=0805S8F7152T5E, Max Working Current=5A, Max Working Voltage=150, Package / Case=0805, Power=1/8W, Resistance="71.5k Ohms", Tolerance="±1 %", ComponentLink1Description="Product Site", ComponentLink1URL=https://www.digikey.com/en/products/detail/yageo/RC0805JR-07180RL/728263?_gl=1*zoghfp*_up*MQ..*_gs*MQ..&gclid=Cj0KCQjwrZTRBhDSARIsAHidYfd1C74hHvjrZ7UgtDa42yojQwh2zPzpseonp8MFHviGIzWBVsBX2EkaAnv4EALw_wcB&gclsrc=aw.ds&gbraid=0AAAAADrbLlgJKbqSaj2dwnRTRiMcVLJnx
R3: library part "RES 0805 6.98k 0805WAF6981T5E", "RES.(2012) 0805 6.98K Ohms 1% 1/10W 100PPM", Manufacturer=ROYALOHM, Manufacturer Code=0805WAF6981T5E, Max Working Current=5A, Max Working Voltage=150VDC, Package / Case=0805, Power=1/8W, Resistance="6.98k Ohms", Tolerance="±1 %", ComponentLink1Description="Product Site", ComponentLink1URL=https://www.digikey.com/en/products/detail/yageo/RC0805JR-07180RL/728263?_gl=1*zoghfp*_up*MQ..*_gs*MQ..&gclid=Cj0KCQjwrZTRBhDSARIsAHidYfd1C74hHvjrZ7UgtDa42yojQwh2zPzpseonp8MFHviGIzWBVsBX2EkaAnv4EALw_wcB&gclsrc=aw.ds&gbraid=0AAAAADrbLlgJKbqSaj2dwnRTRiMcVLJnx
R4 R6 R31: library part "RES 0805 10k 0805S8F1002T5E", "RES.(2012) 0805 10K Ohms 1% 1/8W-S 100PPM", Manufacturer=ROYALOHM, Manufacturer Code=0805S8F1002T5E, Max Working Current=5A, Max Working Voltage=150, Package / Case=0805, Power=1/8W, Resistance="10k Ohms", Tolerance="±1 %", ComponentLink1Description="Product Site"
  R4 R6: ComponentLink1URL=https://www.digikey.com/en/products/detail/yageo/RC0805JR-07180RL/728263?_gl=1*zoghfp*_up*MQ..*_gs*MQ..&gclid=Cj0KCQjwrZTRBhDSARIsAHidYfd1C74hHvjrZ7UgtDa42yojQwh2zPzpseonp8MFHviGIzWBVsBX2EkaAnv4EALw_wcB&gclsrc=aw.ds&gbraid=0AAAAADrbLlgJKbqSaj2dwnRTRiMcVLJnx
  R31: ComponentLink1URL=https://www.ozdisan.com/p/smt-smd-ve-cip-direncler-194/royalohm-0805s8f1002t5e-30240
R5: library part "RES 0805 200k 0805S8F2003T5E", "RES.(2012) 0805 200K Ohms 1% 1/8W-S 100PPM", Manufacturer=ROYALOHM, Manufacturer Code=0805S8F2003T5E, Max Working Current=5A, Max Working Voltage=150VDC, Package / Case=0805, Power=1/8W, Resistance="200k Ohms", Tolerance="±1 %", ComponentLink1Description="Product Site", ComponentLink1URL=https://www.ozdisan.com/p/smt-smd-ve-cip-direncler-194/royalohm-0805s8f2003t5e-465323
R7 R9 R10 R11 R12 R13 R18 R19: library part "RES 0603 10k 0603SAJ0103T5E", "RES.(1608) 0603 10K Ohms 5% 1/10W-S 100PPM", Manufacturer=ROYALOHM, Manufacturer Product Number=0603SAJ0103T5E, Operating Temperature="-55°C ~ 155°C", Package / Case="0603 (1608 Metric)", Power (Watts)="0.1W, 1/10W", Resistance="10 kOhms", Tolerance="±5 %", ComponentLink1Description="Product Site", ComponentLink1URL=https://www.ozdisan.com/p/smt-smd-ve-cip-direncler-194/royalohm-0603saj0103t5e-336243
R8: library part "RES 0603 22 Ohms 0603SAJ0220T5E", "RES.(1608) 0603 22 Ohms 5% 1/10W-S 200PPM", Manufacturer=ROYALOHM, Manufacturer Product Number=0603SAJ0220T5E, Operating Temperature="-55°C ~ 155°C", Package / Case="0603 (1608 Metric)", Power (Watts)="0.1W, 1/10W", Resistance="22 Ohms", Tolerance=±5%, ComponentLink1Description="Product Site", ComponentLink1URL=https://www.ozdisan.com/p/smt-smd-ve-cip-direncler-194/royalohm-0603saj0220t5e-341987
R14 R15 R16 R17 R30 R33: library part "RES 0603 33 Ohms 0603SAJ0330T5E", "RES.(1608) 0603 33 Ohms 5% 1/10W-S 200PPM", Manufacturer=ROYALOHM, Manufacturer Product Number=0603SAJ0330T5E, Operating Temperature="-55°C ~ 155°C", Package / Case="0603 (1608 Metric)", Power (Watts)="0.1W, 1/10W", Resistance="33 Ohms", Tolerance=±5%, ComponentLink1Description="Product Site"
  R14 R15 R16 R17 R30: ComponentLink1URL=https://www.ozdisan.com/p/smt-smd-ve-cip-direncler-194/royalohm-0603saj0220t5e-341987
  R33: ComponentLink1URL=https://www.ozdisan.com/p/smt-smd-ve-cip-direncler-194/royalohm-0603saj0330t5e-346969
R20 R21 R24: library part "RES 0603 100k 0603SAF1003T5E", "RES.(1608) 0603 100K Ohms 1% 1/10W-S 100PPM", Manufacturer=ROYALOHM, Manufacturer Product Number=0603SAF1003T5E, Operating Temperature="-55°C ~ 155°C", Package / Case="0603 (1608 Metric)", Power (Watts)="0.1W, 1/10W", Resistance="100 kOhms", Tolerance="±5 %", ComponentLink1Description="Product Site", ComponentLink1URL=https://www.ozdisan.com/p/smt-smd-ve-cip-direncler-194/royalohm-0603saf1003t5e-339374
R22: library part "RES 0603 1.4k 0603SAF1401T5E", "RES.(1608) 0603 1.4K Ohms 1% 1/10W-S 100PPM", Manufacturer=ROYALOHM, Manufacturer Product Number=0603SAF1401T5E, Operating Temperature="-55°C ~ 155°C", Package / Case="0603 (1608 Metric)", Power (Watts)="0.1W, 1/10W", Resistance="1.4 k Ohms", Tolerance="±1 %", ComponentLink1Description="Product Site", ComponentLink1URL=https://www.ozdisan.com/p/smt-smd-ve-cip-direncler-194/royalohm-0603saf1401t5e-505856
R23: library part "RES 0603 1.8k 0603SAF1801T5E", "RES.(1608) 0603 1.8K Ohms 1% 1/10W-S 100PPM", Manufacturer=ROYALOHM, Manufacturer Product Number=0603SAF1801T5E, Operating Temperature="-55°C ~ 155°C", Package / Case="0603 (1608 Metric)", Power (Watts)="0.1W, 1/10W", Resistance="1.8k Ohms", Tolerance="±1 %", ComponentLink1Description="Product Site", ComponentLink1URL=https://www.ozdisan.com/p/smt-smd-ve-cip-direncler-194/royalohm-0603saf1801t5e-359796
R25: library part "RES 0805 50k 0805S8F5002T5E", "RES.(2012) 0805 50K Ohms 1% 1/8W-S 100PPM", Manufacturer=ROYALOHM, Manufacturer Code=0805S8F5002T5E, Max Working Current=5A, Max Working Voltage=150, Package / Case=0805, Power=1/8W, Resistance="50 kOhms", Tolerance="±1 %", ComponentLink1Description="Product Site", ComponentLink1URL=https://www.ozdisan.com/p/smt-smd-ve-cip-direncler-194/royalohm-0805s8f5002t5e-343425
R26: library part "RES 0805 100R 0805S8F1000T5E", "RES.(2012) 0805 100 Ohms 1% 1/8W-S 200PPM", Manufacturer=ROYALOHM, Manufacturer Code=0805S8F1000T5E, Max Working Current=5A, Max Working Voltage=150, Package / Case=0805, Power=1/8W, Resistance="100 Ohms", Tolerance="±1 %", ComponentLink1Description="Product Site", ComponentLink1URL=https://www.ozdisan.com/p/smt-smd-ve-cip-direncler-194/royalohm-0805s8j0181t5e-335052
R27: library part "RES 0805 180R 0805S8J0181T5E", "RES.(2012) 0805 180 Ohms 5% 1/8W-S 100PPM", Manufacturer=ROYALOHM, Manufacturer Code=0805S8J0181T5E, Max Working Current=5A, Max Working Voltage=150, Package / Case=0805, Power=1/8W, Resistance="180 Ohms", Tolerance="±1 %", ComponentLink1Description="Product Site", ComponentLink1URL=https://www.ozdisan.com/p/smt-smd-ve-cip-direncler-194/royalohm-0805s8j0181t5e-335052
R28: library part "RES 0805 10 Ohms 0805S8J0100T5E", "RES.(2012) 0805 10 Ohms 5% 1/8W-S 400PPM", Manufacturer=ROYALOHM, Manufacturer Code=0805S8J0100T5E, Max Working Current=5A, Max Working Voltage=150VDC, Package / Case=0805, Power=1/8W, Resistance="10 Ohms", Tolerance="±1 %", ComponentLink1Description="Product Site", ComponentLink1URL=https://www.ozdisan.com/p/smt-smd-ve-cip-direncler-194/royalohm-0805s8j0100t5e-29704
R29: library part "RES 0805 1k Ohms 0805S8F1001TDE", "RES.(2012) 0805 1K Ohms 1% 1/8W-S 100PPM", Manufacturer=ROYALOHM, Manufacturer Code=0805S8F1001TDE, Max Working Current=5A, Max Working Voltage=150VDC, Package / Case=0805, Power=1/8W, Resistance="1k Ohms", Tolerance="±1 %", ComponentLink1Description="Product Site", ComponentLink1URL=https://www.ozdisan.com/p/smt-smd-ve-cip-direncler-194/royalohm-0805s8f1001tde-356631
U1: library part "AP64100QSP-13 Buck converter", "Buck Switching Regulator IC Positive Adjustable 0.8V 1 Output 1A 8-SOIC (0.154\", 3.90mm Width) Exposed Pad", Current - Output=1A, Frequency - Switching="500kHz, 100kHz ~ 2.2MHz", Manufacturer="Diodes Incorporated", Operating Temperature="-40°C ~ 125°C (TA)", Package / Case=SOIC-8, Voltage - Output (Max)=40V, Voltage - Output (Min/Fixed)=0.8V, Voltage - Input (Min)=3.8V, ComponentLink1Description="Product Site", ComponentLink1URL=https://www.ozdisan.com/p/dc-dc-voltaj-regulatorleri-275/diodes-ap64100qsp-13-994353, Function=Step-Down, Manufacturer Product Number=AP64100QSP-13, Voltage - Input (Max)=40V
U2: library part "LDO 3V3 MCP1825ST-3302E/DB", "Linear Voltage Regulator IC Positive Fixed 1 Output 500mA SOT-223-3", Current - Output=500mA, Manufacturer="Microchip Technology", Manufacturer Product Number=MCP1825ST-3302E/DB, Operating Temperature="-40°C ~ 125°C", Package / Case=SOT-223-3, Voltage - Output (Min/Fixed)=3.3V, Voltage - Input (Max)=6V, Voltage Dropout (Max)="0.35V @ 500mA", ComponentLink1Description="Product Site", ComponentLink1URL=https://www.digikey.com/en/products/detail/microchip-technology/MCP1825ST-3302E-DB/1635518, PSRR="60dB (100Hz)"
U3: "Mainstream Performance line, Arm Cortex-M3 MCU with 64 Kbytes of Flash memory, 72 MHz CPU, motor control, USB and CAN", Manufacturer_Name=STMicroelectronics, Copyright="Copyright (C) 2025 Ultra Librarian. All rights reserved.", Manufacturer_Part_Number=STM32F103C8T6, RefDes=RefDes, Type=Type
U4: library part "Schmitt Triger 74LVC3G17DP,125", "Buffer, Non-Inverting 3 Element 1 Bit per Element Push-Pull Output 8-TSSOP", Current - Output High, Low="32mA, 32mA", Manufacturer="Nexperia USA Inc.", Operating Temperature="-40°C ~ 125°C (TA)", Voltage - Supply="1.65V ~ 5.5V", ComponentLink1Description="Product Site", ComponentLink1URL=https://www.ozdisan.com/p/buffer-driver-receiver-ve-transceiver-entegreleri-244/nexperia-74lvc3g17dp-125-1066574, Logic Type="Buffer, Non-Inverting", Manufacturer Product Number=74LVC3G17DP,125, Number of Elements=3, Output Type=Push-Pull, Input Type="Schmitt Trigger"
U5: library part "MCP6001T-I/OT OP-AMP 1 CH LOW POWER", "Standard (General Purpose) Amplifier 1 Circuit Rail-to-Rail SOT-23-5", Current - Output / Channel="23 mA", Current - Supply=100µA, Manufacturer="Microchip Technology", Manufacturer Product Number=MCP6001T-I/OT, Operating Temperature="-40°C ~ 85°C", Package / Case=SOT-23-5, Voltage - Supply Span (Min) - (Max)="1.8V to 6V", Voltage - Input Offset="4.5 mV", ComponentLink1Description="Product Site", ComponentLink1URL=https://www.ozdisan.com/p/amplifikatorler-242/microchip-mcp6001t-i-ot-40820, Gain Bandwidth Product="1 MHz", Output Type=Rail-to-Rail
Y1: library part "CRYSTAL 32.768kHz ABS07-120-32.768KHZ-T", "CRYSTAL 32.768kHz 6pF SMD", Frequency="32.768 kHz", Frequency Tolerance=±20ppm, Load Capacitance=6pF, Manufacturer="Abracon LLC", Manufacturer Product Number=ABS07-120-32.768KHZ-T, ComponentLink1Description="Product Site", ComponentLink1URL=https://www.ozdisan.com/p/kristaller-508/abracon-abs07-120-32-768khz-t-446332, Type="kHz Crystal (Tuning Fork)"
Y2: library part "CRYSTAL 8MHz AS-8.000-16-SMD-TR", "CRYSTAL 8MHz HC49SMT 16pF SMD TR RALTRON", Frequency="8 MHz", Frequency Stability=±30ppm, Frequency Tolerance="±50 PPM", Load Capacitance="16 pF", Manufacturer=RALTRON, Manufacturer Code=AS-8.000-16-SMD-TR, Operating Temperature="-20 °C ~ +70 °C", Package / Case=HC-49S, ComponentLink1Description="Product Site", ComponentLink1URL=https://www.ozdisan.com/p/kristaller-508/raltron-as-8-000-16-smd-tr-40447, Type="MHz Crystal"

## Free pads (board coordinates)
  round 2.2 hole 2.2 unplated: 1(72,126.4) 2(24.2,126.4) 3(72,87.169) 4(24.1,87.169)
  round 1 smd: TP_+3V3(57.2,99.2) TP_+5V(72.5,100.75) TP_GND(44.5,120.75) TP_GND(58.45,99.2) TP_GND(72.5,99.5) TP_VP(46.25,120.75)
  round 1 smd far side: TP_GND(58.25,101.25) TP_VCC(58.25,100)

## Via types
v1: diameter 0.6, hole 0.3, Top Layer to Bottom Layer, tented both sides, 85 vias

## Nets (pads, with @x,y where several pads share a name; then routed paths per layer and width w, separated by ;. In a path a pad name is that pad's centre, name@x,y a point inside that pad or via, vN(x,y) a via of type N, cw(c..) or ccw(c..) an arc to the next point about the centre after c; other vN are vias at no path point)
+3V3: C9.2 FB2.1 pad.TP_+3V3 U2.3 | length 13.1
  Top Layer w0.3: pad.TP_+3V3 57.2,100.95 ; v1(57.2,101.9) 57.2,100.95 ; C9.2 61.7,103.3 61.7,102.25 ; U2.3 61.7,102.25 ; 57.2,100.95 57.25,101 59,101 60.25,102.25 61.7,102.25
  Bottom Layer w0.3: v1(57.2,101.9) 57.75,102.45 57.75,104.215 FB2.1
+5V: C6.2 C8.2 C24.2 J7.1 L1.2 pad.TP_+5V R1.2 U2.1 | length 98.3
  Top Layer w0.2: J7.1 44.423,98.5 45.2,99.277 45.2,103.9 45.925,104.625 49.375,104.625 ; R1.2 49.375,107.33 49.375,104.625 ; 69.62,105.56 69.68,105.5 ; C6.2 v1(65.25,107.5) 61.25,107.5 60,106.25 60,104.5 58.25,102.75 51.25,102.75 49.375,104.625
  Top Layer w0.3: U2.1 68.18,100.769 68.769,100.769 ; C8.2 69.5,103.5 69.62,103.62 ; 68.769,100.75 69.55,100.75 ; L1.2 71.04,110.54 69.62,109.12 C6.2 69.62,105.56 69.62,103.62 ; pad.TP_+5V 69.55,100.75 ; 69.55,100.75 69.62,100.82 69.62,103.62
  Mid-Layer 1 w0.2: v1(63.142,120.713) 60.75,118.322 60.75,110.694 63.944,107.5 v1(65.25,107.5)
  Bottom Layer w0.2: v1(63.142,120.713) 65.022,120.713 C24.2
+Vin: C2.2 D1.1 J1.1 | length 12.4
  Top Layer w0.4: 35,118.75 J1.1 ; C2.2@35.5,114.38 35.375,114.38 35,114.755 35,118.57 36.205,118.57 D1.1
+Vp: C4.2 C5.2 FB1.2 pad.TP_VP R2.2 R25.2 U1.2 | length 44.3
  Top Layer w0.2: R25.2 37.555,107.305 38.75,108.5 46.25,108.5 47,109.25 47,118.5 ; R2.2 51.455,121.955 51.5,122
  Top Layer w0.4: FB1.2 47,118.5 48,119.5 48,120.75 ; pad.TP_VP 48,120.75 ; U1.2 55.77,115.73 55.005,116.495 54.44,116.495 54.04,116.895 C4.2 54.04,121.46 53.5,122 51.5,122 48.75,122 48,121.25 48,120.75
BATTERY_VOLTAGE: C32.2 R28.2 U3.19 | length 20
  Top Layer w0.127: R28.2 33.955,108.4 v1(36.5,108.4) ; v1(38.6,106.97) 38.6,103 39.303,102.297 v1(44.4,102.297)
  Mid-Layer 1 w0.127: v1(36.5,108.4) 37.2,108.4 38.6,107 v1(38.6,106.97)
  Bottom Layer w0.127: C32.2 43.6,101.9 43.9,102.2 v1@44.4,102.2 ; v1(44.4,102.297) 44.403,102.297 44.5,102.2 45.7,102.2 46,102.5 U3.19
Button_Down: J4.4 R13.1 R20.1 | length 5.2
  Bottom Layer w0.127: J4.4 27.75,114.5 28.055,114.805 R13.1 R20.1
Button_Settings: J4.3 R12.1 R24.1 | length 6.5
  Bottom Layer w0.127: J4.3 27.5,116.5 28,117 28,118 28.414,118.414 R12.1 R24.1
Button_UP: J4.1 R11.1 R21.1 | length 6.3
  Bottom Layer w0.127: J4.1 27.75,120.5 28,120.75 28,121.75 28.274,122.024 R11.1 R21.1
GND: C2.1 C3.1 C4.1 C5.1 C6.1 C7.1 C8.1 C9.1 C10.2 C11.1 C12.1 C13.1 C14.1 C15.1 C16.1 C17.1 C18.1 C19.2 C20.2 C21.2 C22.1 C23.1 C25.1 C26.2 C27.1 C28.1 C29.1 C30.1 C31.1 C32.1 J1.2 J2.3 J3.2 J4.2 J5.2 J6.2 pad.TP_GND Q1.2 Q2.2 R4.1 R5.1 R6.1 R7.1 R31.1 U1.7 U1.9 U2.2 U2.4 U3.8 U3.23 U3.35 U3.47 U4.4 U5.2
  other v1: 28,91 28,91 35,91 35,91 42,91 42,91 49,91 49,91 63,91 63,91 70,91 70,91 45.5,98 45.5,98 52.5,98 52.5,98 59.5,98 59.5,98 66.5,98 66.5,98 73.5,98 73.5,98 63,105 63,105 66.25,110 68.75,110 66.5,112 66.5,112 73.5,112 73.5,112 65,112.5 67.5,112.5 66.25,115 68.75,115 60,117.5 65,117.5 67.5,117.5 28,119 28,119 63,119 63,119 70,119 70,119 63.75,120 66.25,120 68.75,120 71.25,120
MOTOR_CURRENT: C29.2 J9.3 U3.11 | length 40.7
  Mid-Layer 2 w0.127: v1(48.489,105.512) 50.283,105.512 50.647,105.147 50.637,105.137 50.637,101.263 v1(51.2,100.7)
  Mid-Layer 2 w0.2: v1(33.8,91.1) 33.8,99.8 35.1,101.1 47.3,101.1 48.5,102.3 48.5,105.5 v1(48.489,105.512)
  Bottom Layer w0.127: v1(48.489,105.512) 48.494,105.506 50.461,105.506 U3.11 ; v1(51.2,100.7) C29.2
  Bottom Layer w0.2: v1(33.8,91.1) J9.3 J9.3@34,89
MOTOR_VSENSE_A: C30.2 J9.1 U3.10 | length 43.6
  Mid-Layer 2 w0.127: v1(29.8,91.1) 29.8,100.7 32.2,103.1 40.5,103.1 43.775,106.375 v1(48.489,106.375) 48.513,106.4 50.8,106.4 51.2,106 v1(51.2,102.1)
  Bottom Layer w0.127: J9.1 v1(29.8,91.1) ; v1(48.489,106.375) 48.864,106 U3.10 ; v1(51.2,102.1) 51.2,102.117 51.583,102.5 C30.2
MOTOR_VSENSE_B: C31.2 J9.2 U3.18 | length 30.1
  Mid-Layer 2 w0.2: v1(31.8,91.1) 31.8,100 33.497,101.697 45.943,101.697 46.328,102.083 v1(46.406,102.083)
  Bottom Layer w0.127: C31.2 45.84,101.117 46.406,101.683 v1(46.406,102.083) 46.406,102.147 46.406,102.211 46.5,102.305 U3.18
  Bottom Layer w0.2: v1(31.8,91.1) J9.2 J9.2@31.875,88.875
n\R\S\T\: J2.5 U3.7 | length 31.4
  Mid-Layer 2 w0.127: v1(27.25,103.75) 40.25,103.75 43.647,107.147 v1(52.9,107.147)
  Bottom Layer w0.127: J2.5@25.5,103.69 25.53,103.72 27.22,103.72 v1(27.25,103.75)
  Bottom Layer w0.2: U3.7 52.522,107.5 52.875,107.147 v1(52.9,107.147)
NetC1_1: C1.1 U1.1 | length 3.8
  Top Layer w0.2: U1.1 59,114 59.5,113.5 C1.1
NetC1_2: C1.2 L1.1 U1.8 | length 13.2
  Top Layer w0.2: 59.255,109.005 59.5,109.25 C1.2
  Top Layer w0.4: U1.8 59.255,109.005 62.255,109.005 63,109.75 L1.1
NetC3_2: C3.2 D1.2 FB1.1 | length 9.2
  Top Layer w0.4: D1.2 41.5,118.525 ; C3.2 41.5,118.525 ; FB1.1 43.615,118.525 41.5,118.525
NetC7_2: C7.2 R3.1 | length 2.5
  Top Layer w0.2: R3.1 56.88,105 C7.2
NetC24_1: C24.1 J5.1 | length 3.3
  Bottom Layer w0.127: J5.1 65.066,122.243 C24.1
NetC25_2: C25.2 R24.2 U4.6 | length 17.4
  Mid-Layer 2 w0.127: v1(32,116.75) 32.05,116.8 38.3,116.8 39.25,117.75 v1(39.25,121)
  Bottom Layer w0.127: R24.2 30.865,116.75 v1(32,116.75) ; U4.6 38.127,118.673 39.202,118.673 39.25,118.625 ; v1(39.25,121) 39.25,118.625 ; C25.2 39.459,118.041 39.25,118.25 39.25,118.625
NetC26_1: C26.1 R21.2 U4.3 | length 8
  Bottom Layer w0.127: R21.2@30.944,120 R21.2 32.75,120.219 ; U4.3 33.075,118.825 33.053,118.803 32.75,119.105 32.75,120.219 ; C26.1 33,121.25 32.75,121 32.75,120.219
NetC27_2: C27.2 R20.2 U4.1 | length 7.8
  Bottom Layer w0.127: R20.2 32.25,113 34.025,114.775 34.025,115.75 ; U4.1 34.025,115.75 ; C27.2 34.025,115.75
NetC28_2: C28.2 R29.2 U5.3 | length 4.7
  Top Layer w0.127: C28.2 C28.2@33.697,100.8 ; U5.3 33.75,100.853 C28.2@33.697,100.8 ; R29.2 C28.2@33.697,100.8
NetJ3_3: J3.3 R8.1 | length 3.6
  Bottom Layer w0.127: R8.1 R8.1@44.25,92.309 ; R8.1@44.31,92.249 R8.1@44.348,92.287
  Bottom Layer w0.2: J3.3 R8.1@44.25,92.309
NetJ3_4: J3.4 R14.1 | length 3.5
  Bottom Layer w0.127: J3.4 46.25,92.284 R14.1
NetJ3_5: J3.5 R15.1 | length 3.5
  Bottom Layer w0.127: R15.1 48.25,92.221 J3.5
NetJ3_6: J3.6 R16.1 | length 3.5
  Bottom Layer w0.127: R16.1 50.25,92.278 J3.6
NetJ3_7: J3.7 R19.2 U3.14 | length 16.8
  Bottom Layer w0.127: U3.14 48.5,100.928 49.25,100.178 49.25,96.25 51.25,94.25 51.25,92.514 51.502,92.262 R19.2 52.25,92.259 J3.7
NetJ3_8: J3.8 R17.1 | length 3.7
  Bottom Layer w0.127: R17.1@54.015,92.275 R17.1@54.148,92.142 ; J3.8 54.25,92.283 R17.1
NetJ3_9: J3.9 R18.2 U3.12 | length 20.1
  Bottom Layer w0.127: U3.12 50.466,97.284 51.5,96.25 53.5,96.25 55.25,94.5 55.25,92.75 55.659,92.341 56.184,92.341 R18.2 J3.9
NetJ5_3: J5.3 R9.1 U3.46 | length 23.4
  Mid-Layer 2 w0.127: v1(48.63,110.5) 48.665,110.535 49.035,110.535 58.3,119.8 61.066,122.566 v1(61.066,123.7)
  Bottom Layer w0.127: U3.46 48.076,111.89 48.076,111.054 v1(48.63,110.5) ; J5.3 v1(61.066,123.7) 61.066,122.359 R9.1
NetJ6_1: J6.1 R10.1 U3.45 | length 21.3
  Mid-Layer 2 w0.127: v1(47.75,110.5) 56.25,119 v1(56.25,122.25)
  Bottom Layer w0.127: U3.45 47.5,110.878 47.75,110.628 v1(47.75,110.5) ; J6.1 55,125.404 R10.1 55.025,122.25 v1(56.25,122.25)
NetJ7_2: J7.2 R26.1 | length 3.5
  Top Layer w0.2: J7.2 R26.1
NetJ7_3: J7.3 R27.1 | length 3.6
  Top Layer w0.1: R27.1@28.745,94.5 R27.1
  Top Layer w0.2: J7.3 R27.1@28.745,94.5
NetJ8_1: J8.1 R30.1 | length 3.2
  Bottom Layer w0.127: R30.1 J8.1@47,125.55
NetJ8_2: J8.2 R33.1 | length 3.1
  Bottom Layer w0.127: J8.2 45.02,122.32 R33.1
NetJ8_3: J8.3 U3.41 | length 14.5
  Bottom Layer w0.127: J8.3 43.02,120.98 45.5,118.5 U3.41
NetJ8_4: J8.4 U3.40 | length 15.1
  Bottom Layer w0.127: J8.4 41.02,122.38 45,118.4 U3.40
NetQ1_1: Q1.1 R22.1 | length 1.7
  Top Layer w0.1: Q1.1 Q1.1@34.625,95.875
  Top Layer w0.2: Q1.1@34.625,95.875 R22.1
NetQ1_3: Q1.3 R26.2 | length 1.6
  Top Layer w0.1: R26.2 R26.2@31.005,96.55
  Top Layer w0.2: R26.2@31.005,96.55 Q1.3
NetQ2_1: Q2.1 R23.1 | length 1.7
  Top Layer w0.1: R23.1@36.25,92.95 R23.1
  Top Layer w0.2: Q2.1 R23.1@36.25,92.95
NetQ2_3: Q2.3 R27.2 | length 2
  Top Layer w0.1: R27.2 30.955,94.01 R27.2@31.365,93.6
  Top Layer w0.2: R27.2@31.365,93.6 Q2.3
NetR1_1: R1.1 R6.2 U1.5 | length 4.8
  Top Layer w0.2: R1.1 51.455,108.977 ; R6.2 51.455,110.455 51.455,108.977 ; U1.5 51.483,109.005 51.455,108.977
NetR2_1: R2.1 R4.2 U1.3 | length 10.4
  Top Layer w0.2: R2.1 49.545,118.455 49.75,118.25 51.25,118.25 51.5,118 51.5,117.045 R4.2 51.455,115.795 51.75,115.5 54.112,115.5 54.5,115.112 U1.3
NetR3_2: R3.2 U1.6 | length 2.1
  Top Layer w0.2: R3.2 54.5,108.98 U1.6
NetR5_2: R5.2 U1.4 | length 1.8
  Top Layer w0.2: R5.2 U1.4
NetR7_2: R7.2 U3.44 | length 2.3
  Bottom Layer w0.127: U3.44 47.076,112.043 47.076,112.693 47.097,112.714 47.097,112.812 47.5,113.215 R7.2
NetR14_2: R14.2 U3.17 | length 10.1
  Bottom Layer w0.127: R14.2 46.253,99.644 47,100.391 U3.17
NetR15_2: R15.2 U3.16 | length 10.2
  Bottom Layer w0.127: U3.16 47.5,100.404 48.235,99.67 R15.2
NetR16_2: R16.2 U3.15 | length 10.7
  Bottom Layer w0.127: U3.15 48,100.692 48.75,99.942 48.75,95.75 50.197,94.303 50.197,93.782 R16.2
NetR17_2: R17.2 U3.13 | length 13.7
  Bottom Layer w0.127: U3.13 49,101.089 49.75,100.339 49.75,96.5 50.5,95.75 53.5,95.75 54.254,94.996 R17.2
NetR22_2: R22.2 U3.26 | length 13.6
  Top Layer w0.127: R22.2 36.425,97.2 v1(37.5,97.2)
  Bottom Layer w0.127: v1(37.5,97.2) 37.5,104.6 38.4,105.5 U3.26
NetR23_2: R23.2 U3.25 | length 15.9
  Top Layer w0.1: R23.2 R23.2@36.55,94.7
  Top Layer w0.127: R23.2@36.55,94.7 36.65,94.6 v1(38.2,94.6)
  Bottom Layer w0.127: v1(38.2,94.6) 38.2,104.4 38.8,105 U3.25
NetR25_1: R25.1 R29.1 R31.2 | length 6.7
  Top Layer w0.127: R25.1 R31.2 35.645,102.655 36.1,102.2 36.945,102.2 37.539,101.606 37.539,100.816 R29.1
NetR28_1: R28.1 U5.1 U5.4 | length 11.2
  Top Layer w0.127: U5.1 30.9,103.5 30.3,104.1 30.3,107.7 30.9,108.3 R28.1 31.945,107.455 32.3,107.1 33.4,107.1 33.75,106.75 U5.4
NetR30_2: R30.2 U3.43 | length 9.1
  Bottom Layer w0.127: U3.43 46.5,118.7 47,119.2 R30.2
NetR33_2: R33.2 U3.42 | length 9.3
  Bottom Layer w0.127: R33.2 45.025,119.675 46,118.7 U3.42
NetU3_33: U3.33 U4.2 | length 27.1
  Mid-Layer 2 w0.127: v1(32.747,118.22) 30.72,118.22 29.4,116.9 29.4,109 30.6,107.8 v1(40.7,107.8)
  Bottom Layer w0.127: v1(32.747,118.22) 33.98,118.22 U4.2 ; v1(40.7,107.8) 40.7,108.515 41.181,108.996 42.03,108.996 U3.33
NetU3_38: U3.38 U4.5 | length 15.1
  Mid-Layer 1 w0.127: v1(38,121) 38,116.2 39.95,114.25 v1(43.5,114.25)
  Bottom Layer w0.127: U4.5 38,119.5 v1(38,121) ; v1(43.5,114.25) 44,113.75 U3.38
NetU3_39: U3.39 U4.7 | length 11.5
  Bottom Layer w0.127: U4.7 38.575,118.175 40,116.75 43.849,116.75 44.436,116.162 44.436,112.03 U3.39
OSC32_IN: C19.1 U3.3 Y1.1 | length 8.8
  Bottom Layer w0.127: U3.3 56.25,109.5 57.5,110.75 Y1.1
OSC32_OUT: C10.1 U3.4 Y1.2 | length 8.8
  Bottom Layer w0.127: U3.4 56.25,109 56.934,108.316 58.184,108.316 58.5,108 Y1.2
OSC_IN: C21.1 U3.5 Y2.1 | length 27.8
  Bottom Layer w0.127: U3.5 56.212,108.5 64.712,100 66.5,100 69.332,102.832 69.332,103.516 70.75,104.935 70.75,105.753 C21.1
OSC_OUT: C20.1 U3.6 Y2.2 | length 24.9
  Bottom Layer w0.127: U3.6 56.25,108 64.5,99.75 64.5,98.25 Y2.2
  Bottom Layer w0.2: C20.1 62.413,96.418 Y2.2
SW_CLK: J2.4 U3.37 | length 26.2
  Mid-Layer 2 w0.127: v1(27.25,105) 40,105 42.75,107.75 v1(42.75,113.5)
  Bottom Layer w0.2: J2.4@25.5,104.96 25.52,104.98 27.23,104.98 v1(27.25,105) ; v1(42.75,113.5) 42.858,113.5 43.082,113.276 43.234,113.276 43.5,113.01 U3.37
SW_DIO: J2.2 U3.34 | length 17.3
  Bottom Layer w0.2: J2.2 39.241,107.57 41.131,109.46 41.994,109.46 U3.34
VCC: C11.2 C12.2 C13.2 C14.2 C15.2 C16.2 C17.2 C18.2 C22.2 C23.2 FB2.2 J2.1 J3.1 pad.TP_VCC R8.2 R9.2 R10.2 R11.2 R12.2 R13.2 R18.1 R19.1 U3.1 U3.9 U3.24 U3.36 U3.48 U4.8 U5.5 | length 177.5
  Top Layer w0.2: v1(31,106.2) 31.655,106.2 31.85,106.005 U5.5
  Mid-Layer 1 w0.1: v1@44.237,95.013 v1(44.331,95.013) v1@44.338,95.006 ; v1@51.858,95.006 51.865,95 v1(52,95)
  Mid-Layer 1 w0.2: v1(31,106.2) 39.3,106.2 ; v1(31.739,121.974) 30.974,121.974 30.25,121.25 30.25,116 31.15,115.1 32,115.1 ; v1(33,116.1) 32,115.1 ; v1@44.237,95.013 39.3,99.95 39.3,106.2 ; v1@44.338,95.006 v1@51.858,95.006 ; v1(52,95) 53,95 56.3,98.3 v1(56.3,101.1) 56.3,108.2 v1(52.75,111.75) ; 32,115.1 32,111.75 33.25,110.5 v1(39.209,110.5) 39.286,110.423 39.286,110.197 39.3,110.183 39.3,106.2
  Bottom Layer w0.2: J2.1@25.5,108.77 28.115,108.77 29.845,110.5 v1(39.209,110.5) ; R13.2 30.78,114.75 32.25,114.75 33,115.5 v1(33,116.1) 33,117 31.586,118.414 R12.2 ; R11.2 30.775,121.974 v1(31.739,121.974) ; U4.8 38.007,117.493 38.743,117.493 39.209,117.027 C13.2 ; C14.2 v1(39.209,110.5) ; C13.2@39.209,111.5 v1(39.209,110.5) ; C22.2 39.797,92.207 40.815,92.207 ; J3.1 40.25,90.278 40.815,90.843 40.815,92.207 ; C11.2 41.38,101.593 ; C12.2@41.646,100.5 C12.2 41.38,100.766 41.38,101.593 ; U3.36 v1(39.209,110.5) ; U3.24 43.5,102.6 42.493,101.593 ; U3.48 49.04,112.006 49.04,112.79 49.603,113.353 49.603,113.894 C15.2 49.791,114 52.75,114 ; U3.9 51.5,106.5 51.75,106.25 51.75,105.176 51.867,105.059 52.791,105.059 ; U3.1 51.5,110.5 51.75,110.25 C16.2 ; v1(52,95) 52,94.892 52.25,94.642 52.25,93.714 R19.1 ; C16.2@52.75,110.291 v1(52.75,111.75) 52.75,114 ; C17.2 52.791,105.059 ; C18.2@52.791,105.75 52.791,105.059 ; R10.2 55,116.8 52.75,114.55 52.75,114 ; R18.1 56.3,93.775 v1(56.3,101.1) 56.3,104.165 FB2.2 56.215,104.983 56.098,105.1 52.832,105.1 52.791,105.059 ; 56.4,100 pad.TP_VCC ; 40.815,92.207 C23.2 42.06,92.433 42.683,92.433 43,92.75 43,93.5 43.262,93.762 R8.2 44.331,93.847 v1(44.331,95.013) 42.407,96.937 42.407,101.507 42.493,101.593 ; 41.38,101.593 42.493,101.593
pads on no net: U3.2 U3.20 U3.21 U3.22 U3.27 U3.28 U3.29 U3.30 U3.31 U3.32

## Polygon pours and split planes (outlines as drawn)
GND on Bottom Layer "GND_L04_P003" (solid, remove dead copper, pour order 3): 74.6,130 74.4,129.8 19.8,129.8 19.8,86 21.8,84 22,84.2 75.2,84.2 75.2,128.8 75.7,129.3